# Altium PCB 分电板V2.PcbDoc (part 1 of 2)
Units mil, origin at the board's own origin, x right, y up, seen from the top; angles counter-clockwise.
Board outline 3149.61 x 2362.21 mil, 4 copper layers (Top Layer, GND, POWER, Bottom Layer), stack 23.756 mil thick; 196 components, 158 nets, 590 pads, 320 vias.
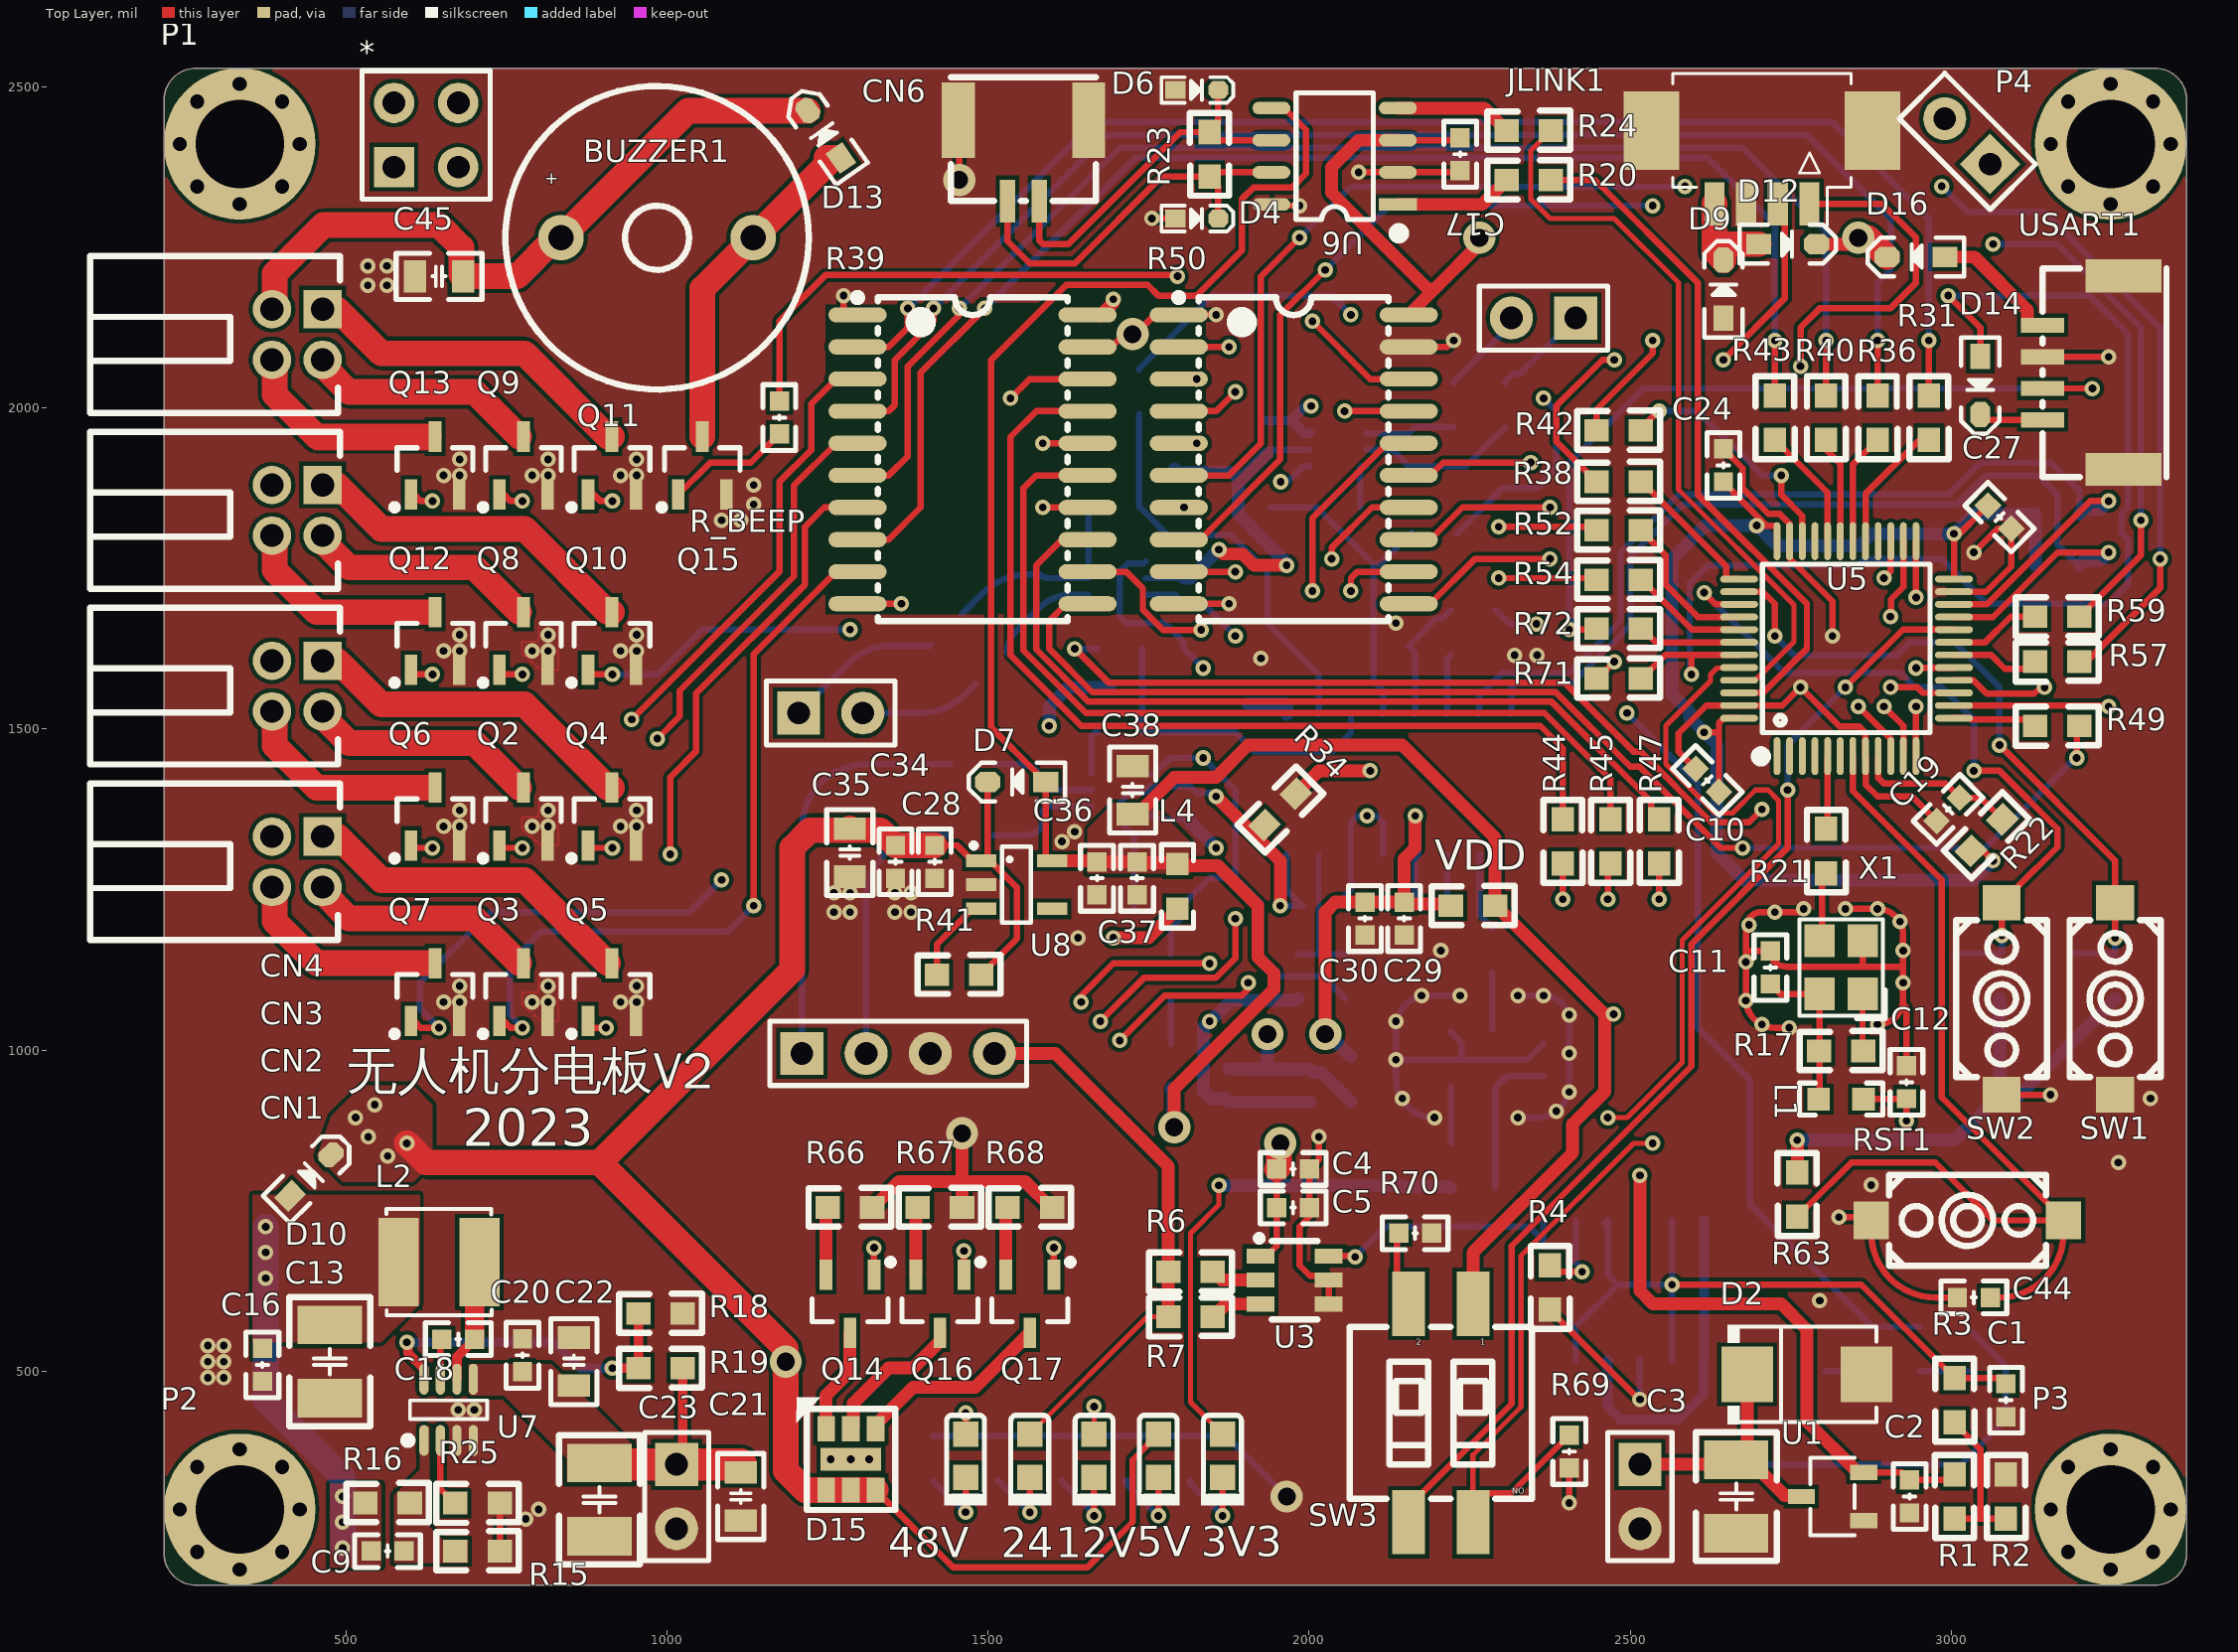
[diagram p0: Top Layer view]
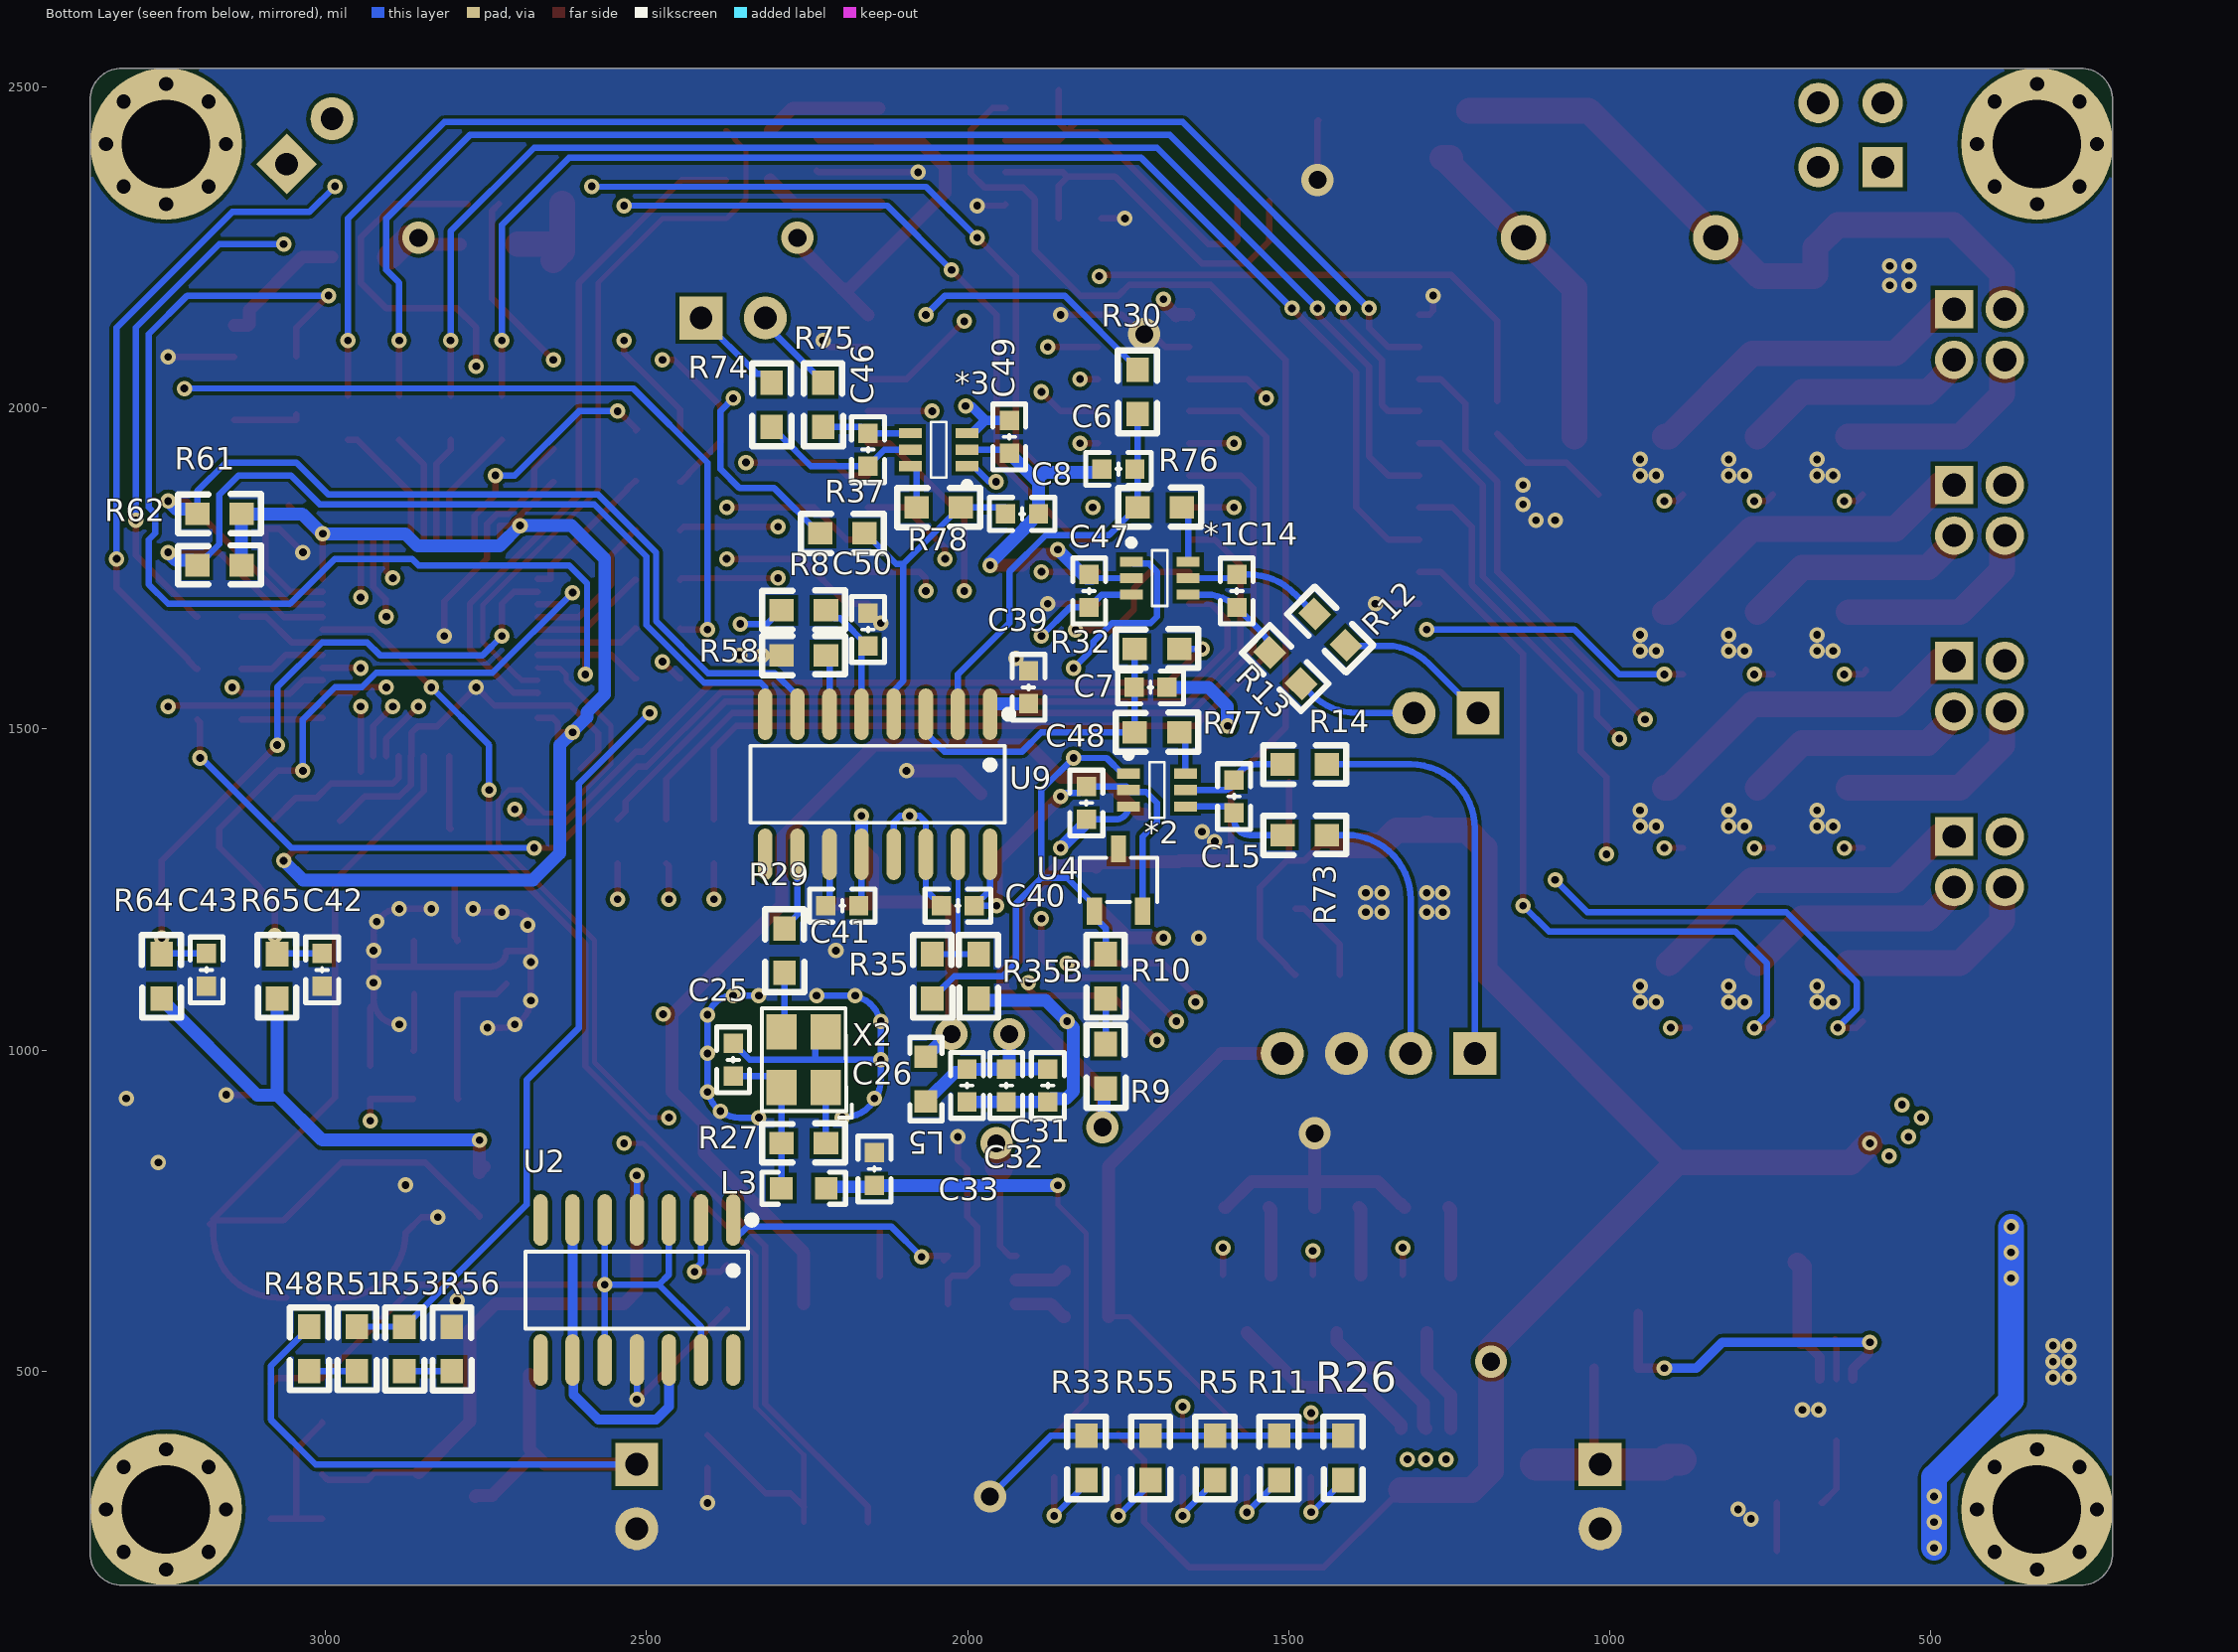
[diagram p1: Bottom Layer view, seen from below]
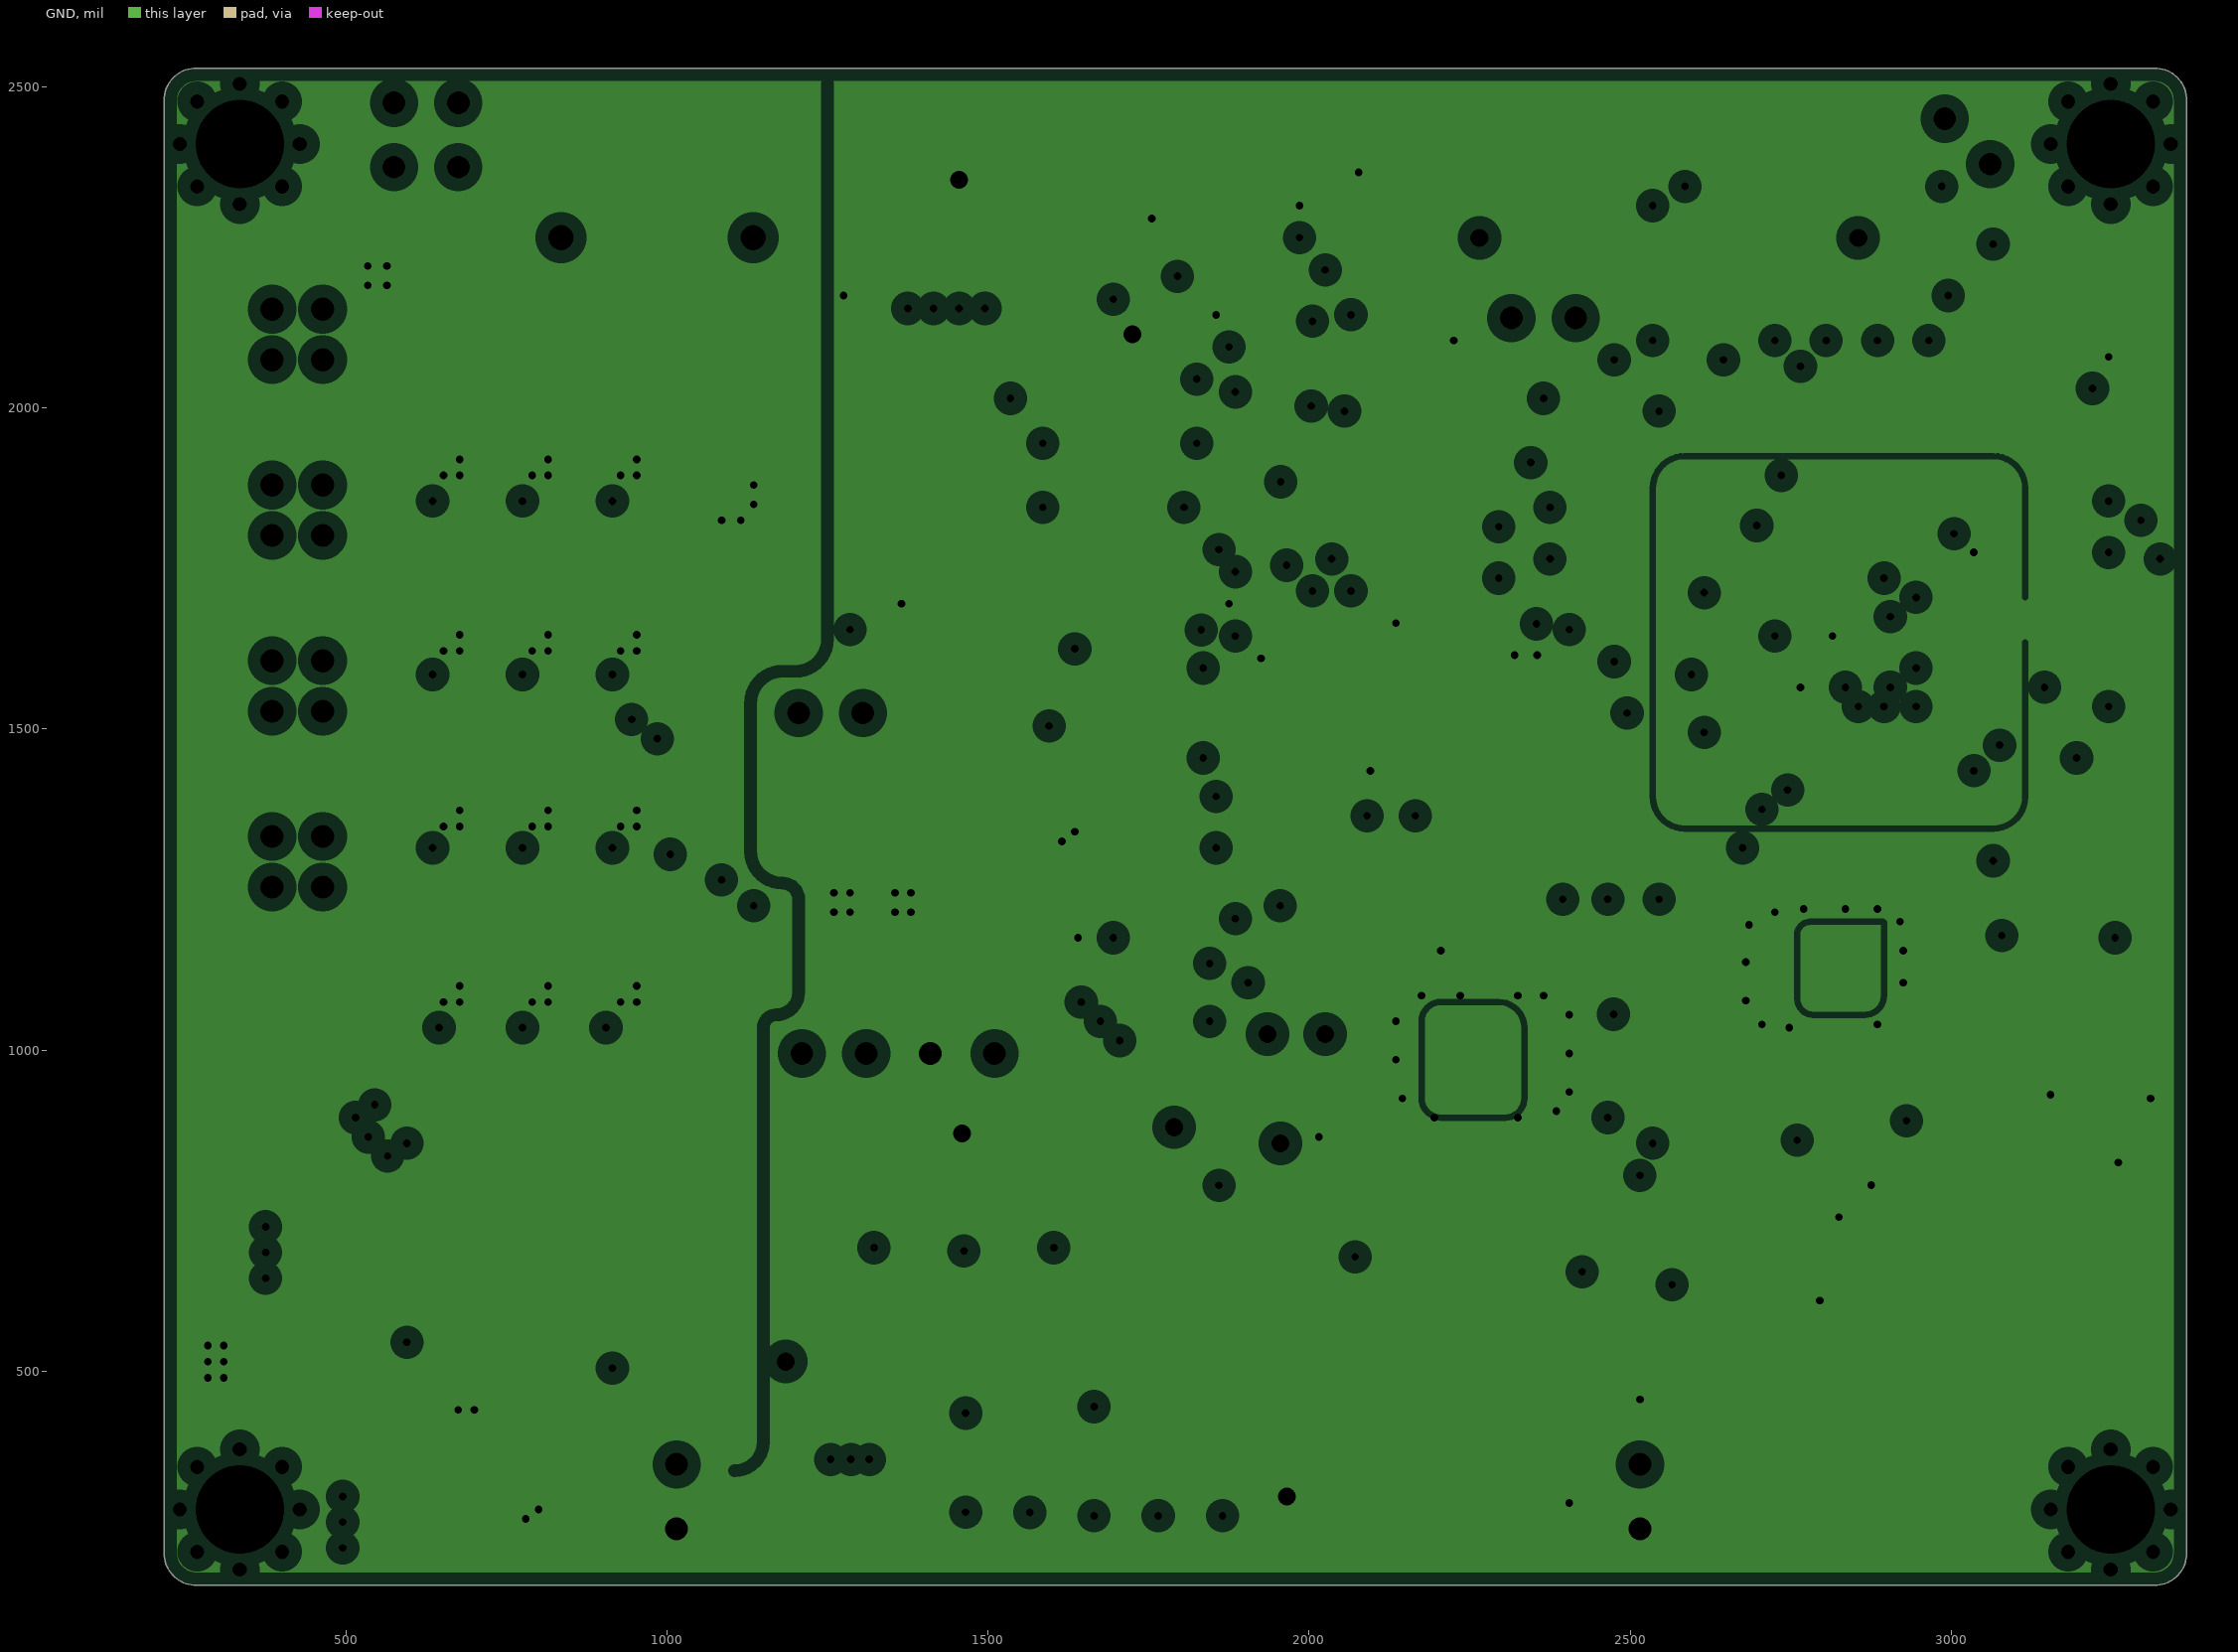
[diagram p2: GND, clearances drawn from the general rule]
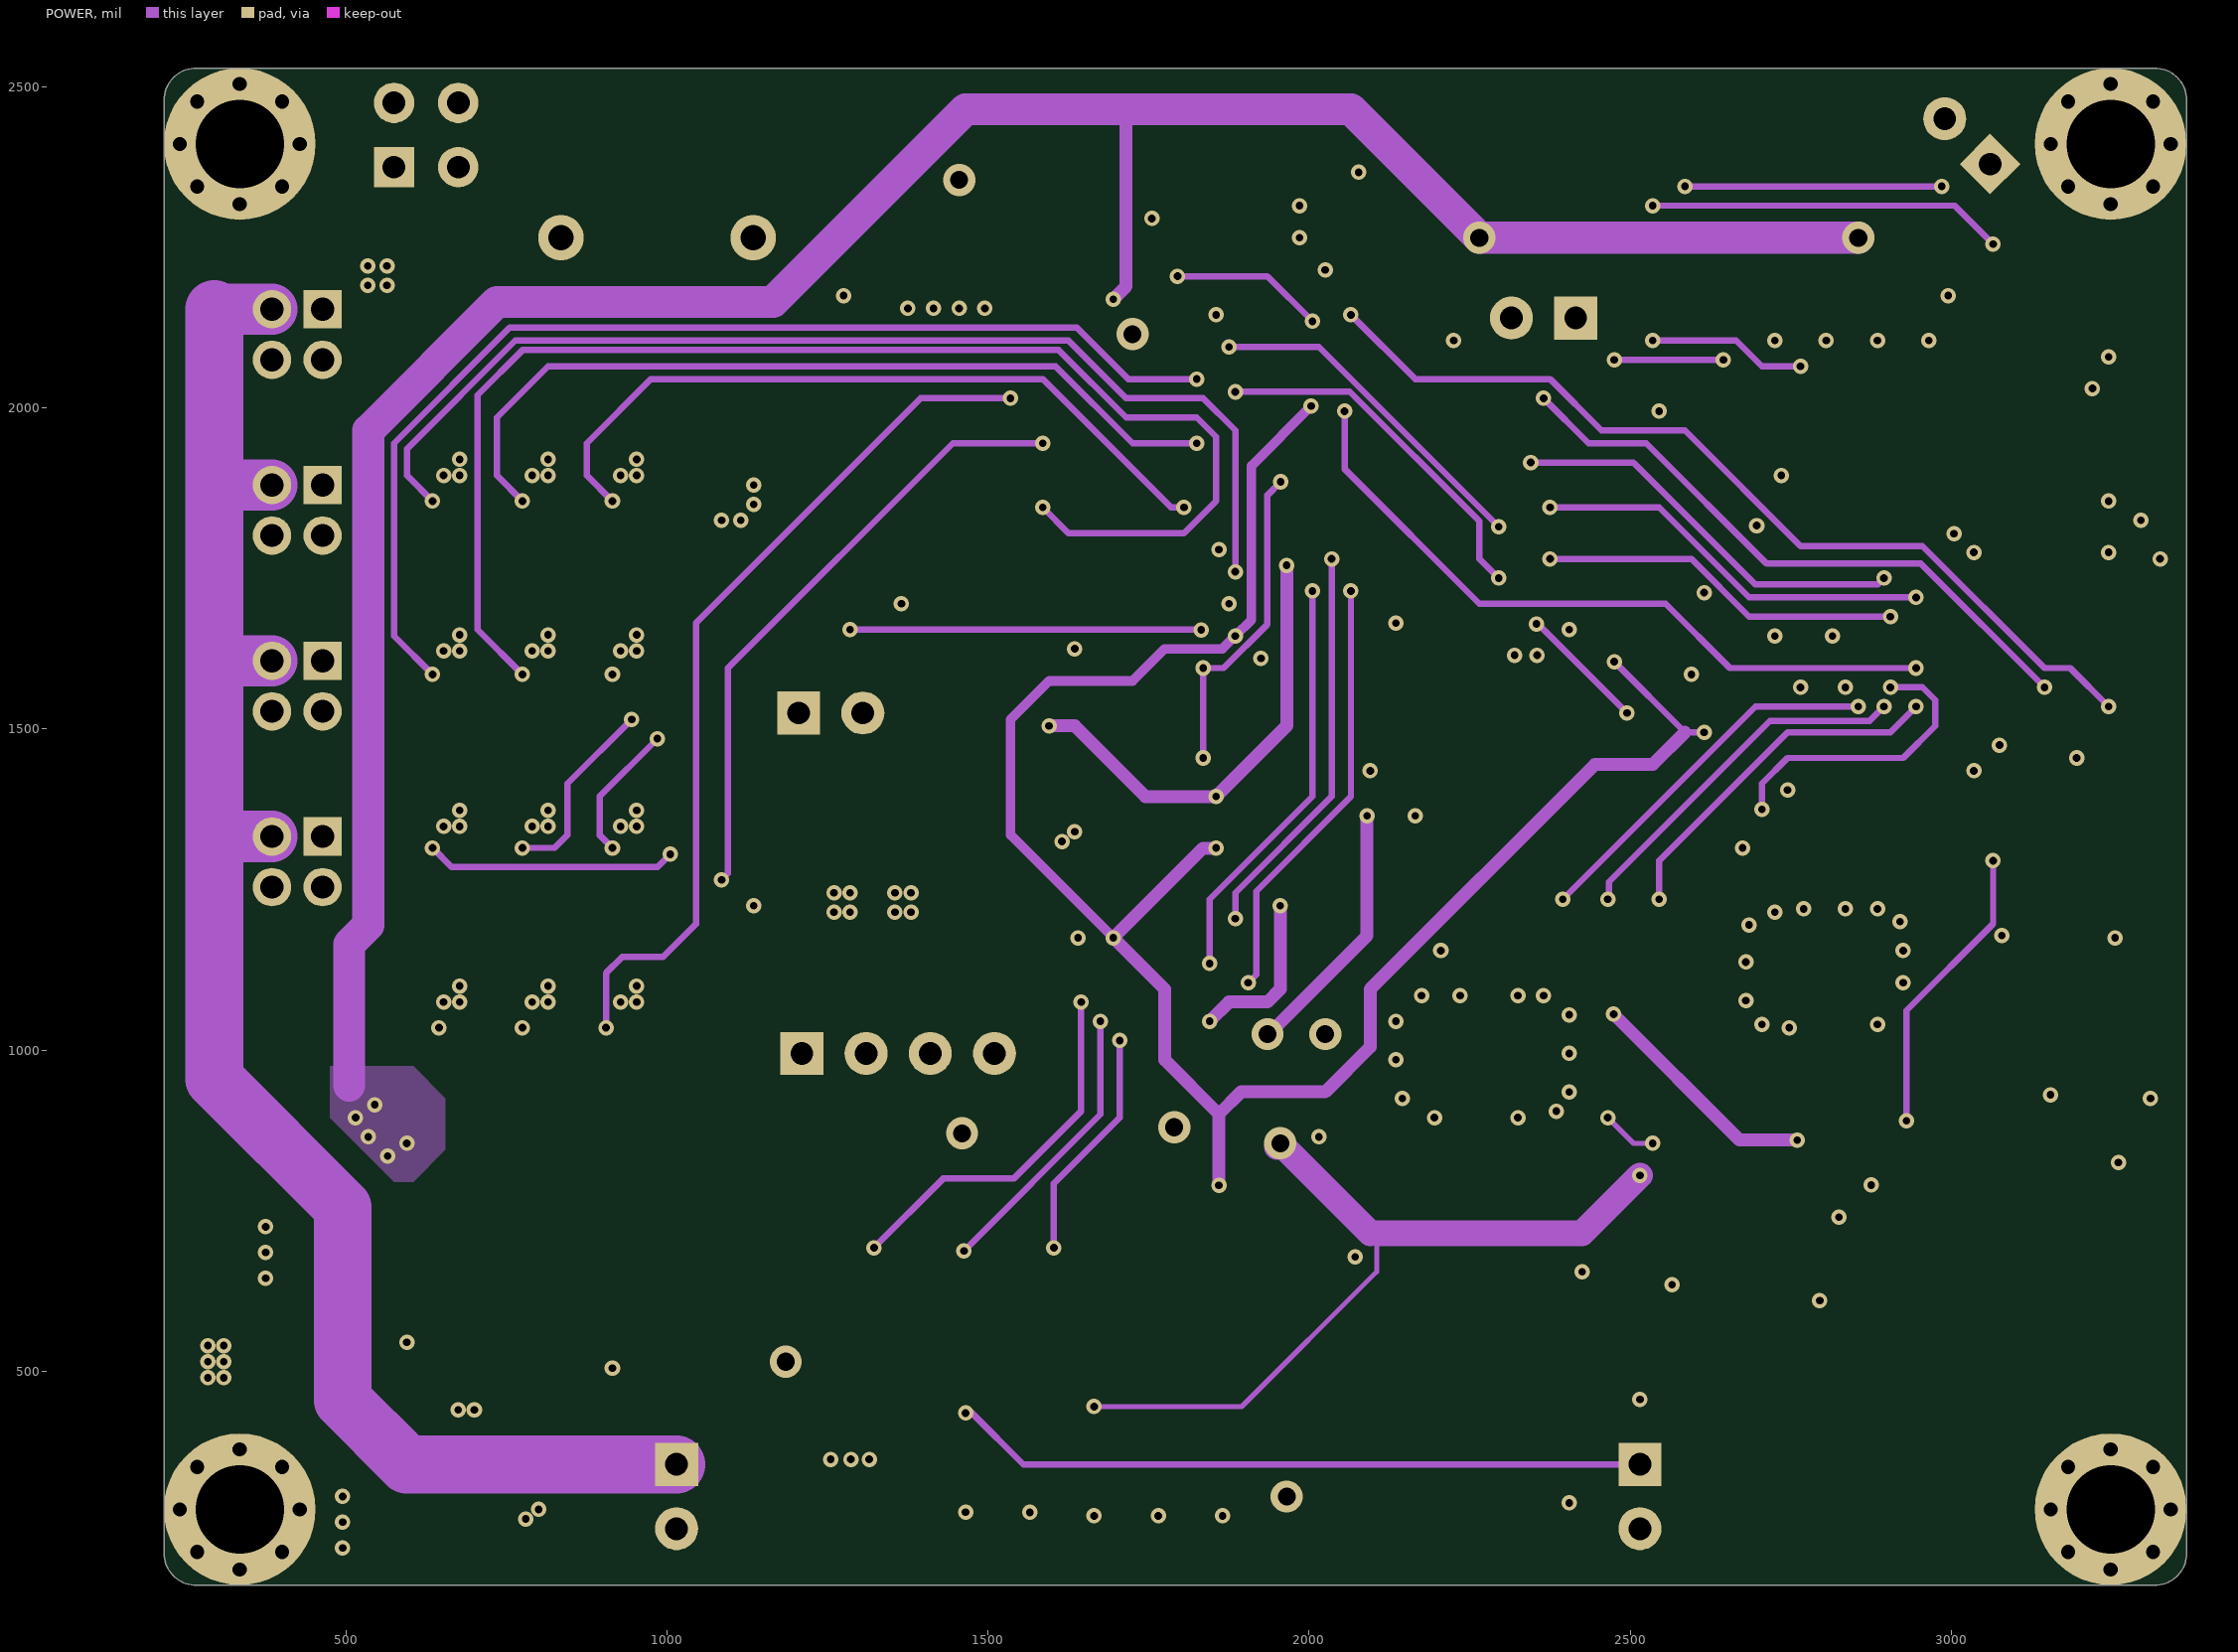
[diagram p3: POWER]

## Layer stack, top to bottom
Top Solder: solder mask 0.4, Solder Resist, Dk 3.5
Top Layer: signal copper 1.4
Dielectric 2: prepreg 2.8, PP-006, Dk 4.1
GND: plane copper 1.3778, net GND
Dielectric 1: dielectric 12.6, FR-4, Dk 4.8
POWER: signal copper 1.3778
Dielectric 3: prepreg 2.8, PP-006, Dk 4.1
Bottom Layer: signal copper 1.4
Bottom Solder: solder mask 0.4, Solder Resist, Dk 3.5

## Board outline
216.89,216.89 216.89,2479.09 cw(c266.89,2479.09) 266.89,2529.09 3316.5,2529.09 cw(c3316.5,2479.09) 3366.5,2479.09 3366.5,216.89 cw(c3316.5,216.89) 3316.5,166.89 266.89,166.89 cw(c266.89,216.89)

## Design rules (kind name [scope] priority, off if disabled: settings)
Clearance [All] p1: gap=5.5 ignorepadtopadclearanceinfootprint=TRUE except(5: Arc-Arc Arc-Track Track-Track; 6: SMDPad-SMDPad SMDPad-THPad SMDPad-Via SMDPad-Fill SMDPad-Poly SMDPad-Region SMDPad-Text SMDPad-Hole THPad-THPad THPad-Via THPad-Fill THPad-Poly THPad-Region THPad-Text THPad-Hole Via-Via Via-Fill Via-Poly Via-Region Via-Text Via-Hole Fill-Hole Poly-Hole Region-Hole Text-Hole)
ComponentClearance [All] p1: gap=1 collisioncheckmode=3 verticalgap=1 showdistances=TRUE
DiffPairsRouting [All] p1: maxlimit=12 minlimit=8 mostfreqgap=10 toplayer_minwidth=8 toplayer_maxwidth=15 toplayer_prefwidth=10 midlayer1_minwidth=8 midlayer1_maxwidth=15 midlayer1_prefwidth=10 bottomlayer_minwidth=8 bottomlayer_maxwidth=15 bottomlayer_prefwidth=10 maxuncoupledlength=500
HoleSize [All] p1: absolutevalues=TRUE maxlimit=1574.8 minlimit=11.81 maxpercent=80.000 minpercent=20.000
HoleToHoleClearance [All] p1: gap=8 allowstackedmicrovias=TRUE
MinimumSolderMaskSliver [All] p1: minsoldermaskwidth=0
NetAntennae [All] p1: netantennaetolerance=1
PasteMaskExpansion [All] p1: expansion=5
PlaneClearance [All] p1: clearance=20
PlaneConnect [All] p1: pad.planeconnectstyle=Relief pad.reliefexpansion=20 pad.reliefentries=4 pad.reliefconductorwidth=25 pad.reliefairgap=10 via.planeconnectstyle=Direct via.reliefexpansion=20 via.reliefentries=4 via.reliefconductorwidth=10 via.reliefairgap=10
PolygonConnect [All] p1: connectstyle=Direct reliefconductorwidth=25 reliefentries=4 polygonreliefangle="90 Angle" airgapwidth=10
RoutingVias [All] p1: holewidth=20 width=35 viastyle="Through Hole" minholewidth=11.81 minwidth=23.62 maxholewidth=1574.8 maxwidth=1580.8
SilkToSilkClearance [All] p1: silktosilkclearance=0
SilkToSolderMaskClearance [IsPad] p1: minsilkscreentomaskgap=0 clearancetoexposedcopper=TRUE
SolderMaskExpansion [All] p1: expansion=5
Width [All] p1: maxlimit=125 minlimit=5 preferedwidth=20
19 further rules are at their usual default settings.

## Components (designator, comment, footprint, x,y, rotation, side; value= is the part's Value field where it differs from the comment)
3V3 "LED/绿" LED_0603 1865,368.47 r90 top
5V "LED/蓝" LED_0603 1765,368.47 r90 top
12V "LED" LED_0603 1665,368.46 r90 top
24 "LED" LED_0603 1565,368.47 r90 top (schematic designator 24_ON)
48V "LED/蓝" LED_0603 1465,368.46 r90 top
* "上中板连接器" 上中板连接器 1015,255 r0 top locked
*1 "LT199" SC70-6L 1700.71,1735 r180 bottom
*2 "LT199" SC70-6L 1705,1405 r180 bottom
*3 "LT199" SC70-6L 2045,1935 r0 bottom
BUZZER1 "TMB12A12" BUZ-TH_BD12.0-P7.60-D0.6-FD 984.6,2265 r0 top value=2400Hz
C1 "10nF" "C 0603_L" 3085,455 r90 top
C2 "10uF" "C 0603_L" 2935,305 r90 top
C3 "CAP" "C 1210_L" 2665,305 r270 top
C4 "1uF" "C 0603_L" 1975,815 r180 top
C5 "100nF" "C 0603_L" 1975,755 r180 top
C6 "1uf" "C 0603_L" 1765,1905 r0 bottom
C7 "1uf" "C 0603_L" 1715,1565 r180 bottom
C8 "1uf" "C 0603_L" 1915,1835 r180 bottom
C9 "22pF/50V/0603" "C 0603_L" 565,220 r0 top
C10 "100nf" "C 0603_L" 2620,1420 r135 top
C11 "100nF" "C 0603_L" 2718.17,1128.75 r270 top
C12 "1uF" "C 0603_L" 2930,950 r270 top
C13 "47uF/50V/1210" "C 1210_L" 475,515 r270 top
C14 "100nf" "C 0603_L" 1580.71,1715 r90 bottom
C15 "100nf" "C 0603_L" 1585,1395 r90 bottom
C16 "100nF/50V/0603" "C 0603_L" 370,510 r270 top
C17 "100nF/50V/0603" "C 0603_L" 2235,2395 r90 top
C18 "10nF/50V/0603" "C 0603_L" 675,550 r180 top
C19 "100nf" "C 0603_L" 2995,1375 r225 top
C20 "100nF/50V/0603" "C 0603_L" 775,525 r90 top
C21 "1uF/50V/0805" "C 0805_L" 1115,305 r270 top
C22 "4.7uF/50V/0805" "C 0805_L" 855,515 r90 top
C23 "47uF/50V/1210" "C 1210_L" 895,300 r270 top
C24 "100nf" "C 0603_L" 2645,1910.59 r270 top
C25 "100nF" "C 0603_L" 2365,985 r270 bottom
C26 "1uF" "C 0603_L" 2145,815 r270 bottom
C27 "100nf" "C 0603_L" 3075,1830 r135 top
C28 "100nF/50V/0603" "C 0603_L" 1417.01,1293.31 r270 top
C29 "100nF/50V/0603" "C 0603_L" 2147.95,1205 r270 top
C30 "100nF/50V/0603" "C 0603_L" 2086.77,1205 r270 top
C31 "1uF/50V/0603" "C 0603_L" 1875,945 r270 bottom
C32 "100nF/50V/0603" "C 0603_L" 1939.69,945 r270 bottom
C33 "10nF/50V/0603" "C 0603_L" 2000.87,945 r270 bottom
C34 "2.2uF/25V/0603" "C 0603_L" 1355.83,1293.31 r270 top
C35 "4.7uF/25V/0805" "C 0805_L" 1284.6,1307.65 r270 top
C36 "100nF/12V/0402" "C 0603_L" 1669.6,1267.65 r270 top
C37 "2.2uF/25V/0603" "C 0603_L" 1731.89,1267.65 r270 top
C38 "4.7uF/25V/0805" "C 0805_L" 1725,1405 r90 top
C39 "1uF" "C 0603_L" 1905,1565 r270 bottom
C40 "0.1uF" "C 0603_L" 2015,1225 r0 bottom
C41 "0.1uF" "C 0603_L" 2195,1225 r0 bottom
C42 "100nF" "C 0603_L" 3005,1125 r270 bottom
C43 "100nF" "C 0603_L" 3185,1125 r270 bottom
C44 "100nF" "C 0603_L" 3035,615 r180 top
C45 "10uf" "C 0805_L" 645,2205 r180 top
C46 "100nf" "C 0603_L" 2155,1935 r270 bottom
C47 "100nF" "C 0603_L" 1810.71,1715 r270 bottom
C48 "100nF" "C 0603_L" 1815,1385 r270 bottom
C49 "100nF" "C 0603_L" 1935,1955 r90 bottom
C50 "1uf" "C 0603_L" 2155,1655 r90 bottom
CN1 "A2006WR-2x2P" CONN-TH_A2006WR-2X2P 424.37,1293.31 r270 top
CN2 "A2006WR-2x2P" CONN-TH_A2006WR-2X2P 424.37,1566.99 r270 top
CN3 "A2006WR-2x2P" CONN-TH_A2006WR-2X2P 424.37,1840.68 r270 top
CN4 "A2006WR-2x2P" CONN-TH_A2006WR-2X2P 424.37,2114.37 r270 top
CN6 "GH1.25-2P" GH1.25-2P-LT 1555,2385 r180 top
D2 "SMBJ70A_C114008" SMB_L4.6-W3.6-LS5.3-RD 2775,495 r0 top
D4 "ESD5Z5VL" SOD-523 1825,2295 r0 top
D6 "ESD5Z5VL" SOD-523 1825,2495 r0 top
D7 "SD103AWS" SOD-323 1544.6,1417.65 r180 top
D9 "BZX52B5V6" SOD-323 2645,2185 r90 top
D10 "SD103AWS" SOD-323 445,805 r45 top
D12 "SD103AWS" SOD-323 2745,2255 r0 top
D13 "SD103AWS" SOD-323 1245,2426 r125 top
D14 "SD103AWS" SOD-323 3045,2035 r270 top
D15 "RGB3030" LED-SMD_L3.0-W3.0_C9900015600 1272.28,330.25 r180 top
D16 "SD103AWS" SOD-323 2945,2235 r180 top
JLINK1 "MX1.25_4p" MX1.25_4PIN 2705,2375 r0 top
L1 "磁珠470Ω/100MHz" "L 0603" 2828.17,923.75 r0 top
L2 "33uF/0.9A" IND-SMD_L4.0-W4.0 645,670 r180 top
L3 "磁珠470Ω/100MHz" "L 0603" 2255,785 r180 bottom
L4 "磁珠470Ω/100MHz" "L 0603" 1795,1255 r90 top
L5 "磁珠470Ω/100MHz" "L 0603" 2065,955 r270 bottom
P1 "固定孔" 固定孔 334.69,2410.99 r0 top
P2 "固定孔" 固定孔 334.69,285.01 r0 top
P3 "固定孔" 固定孔 3248.08,285.01 r0 top
P4 "固定孔" 固定孔 3248.08,2410.99 r0 top
Q2 "5N10-MS" SOT23-3N 776.61,1363.71 r0 top
Q3 "5N10-MS" SOT23-3N 776.61,1090.38 r0 top
Q4 "5N10-MS" SOT23-3N 914.38,1363.71 r0 top
Q5 "5N10-MS" SOT23-3N 914.38,1090.38 r0 top
Q6 "5N10-MS" SOT23-3N 638.83,1363.71 r0 top
Q7 "5N10-MS" SOT23-3N 638.83,1090.38 r0 top
Q8 "5N10-MS" SOT23-3N 776.61,1637.04 r0 top
Q9 "5N10-MS" SOT23-3N 776.61,1910.38 r0 top
Q10 "5N10-MS" SOT23-3N 914.38,1637.04 r0 top
Q11 "5N10-MS" SOT23-3N 914.38,1910.38 r0 top
Q12 "5N10-MS" SOT23-3N 638.83,1637.04 r0 top
Q13 "5N10-MS" SOT23-3N 638.83,1910.38 r0 top
Q14 "5N10-MS" SOT23-3N 1285,605 r180 top
Q15 "5N10-MS" SOT23-3N 1055,1910.38 r0 top
Q16 "5N10-MS" SOT23-3N 1425,605 r180 top
Q17 "5N10-MS" SOT23-3N 1565,605 r180 top
R1 "100K" "R 0603_L" 3005,305 r270 top
R2 "10K" "R 0603_L" 3085,305 r90 top
R3 "10K" "R 0603_L" 3005,455 r90 top
R4 "10K" "R 0603_L" 2375,630.5 r90 top
R5 "47K" "R 0603_L" 1614.5,365 r270 bottom
R6 "10" "R 0603_L" 1815,655 r0 top
R7 "10" "R 0603_L" 1815,585 r0 top
R8 "330" "R 0603_L" 2255,1685 r0 bottom
R9 "1k" "R 0603_L" 1785,975 r90 bottom
R10 "1k" "R 0603_L" 1785,1115 r90 bottom
R11 "47K" "R 0603_L" 1514.75,365 r270 bottom
R12 "100" "R 0603_L" 1435,1655 r225 bottom
R13 "100" "R 0603_L" 1505,1595 r225 bottom
R14 "100" "R 0603_L" 1475,1445 r180 bottom
R15 "30k/0603" "R 0603_L" 705,220 r180 top
R16 "220k/0603" "R 0603_L" 565,295 r180 top
R17 "10k/0603" "R 0603_L" 2828.17,998.75 r180 top
R18 "30k/0603" "R 0603_L" 990,590 r180 top
R19 "100k/0603" "R 0603_L" 990,505 r0 top
R20 "330R/0603" "R 0603_L" 2342,2355 r180 top
R21 "10R" "R 0603_L" 2805,1310 r90 top
R22 "0R" "R 0603_L" 3055,1335 r45 top
R23 "120R/0603" "R 0603_L" 1845,2395 r270 top
R24 "330R/0603" "R 0603_L" 2342,2431.88 r180 top
R25 "47k/0603" "R 0603_L" 705,295 r0 top
R26 "47K" "R 0603_L" 1415,365 r270 bottom
R27 "10k/0603" "R 0603_L" 2255,855 r0 bottom
R29 "10R" "R 0603_L" 2285,1155 r90 bottom
R30 "NAN" "R 0603_L" 1735,2025 r270 bottom
R31 "100R" "R 0603_L" 2965,1985 r90 top
R32 "NAN" "R 0603_L" 1705,1625 r0 bottom
R33 "2k/0603" "R 0603_L" 1815,365 r90 bottom
R34 "0" "R 0603_L" 1955,1375 r45 top
R35 "0" "R 0603_L" 2055,1115 r90 bottom
R35B "NAN" "R 0603_L" 1982.75,1115 r270 bottom
R36 "100R" "R 0603_L" 2885,1985 r90 top
R37 "NAN" "R 0603_L" 2195,1805 r180 bottom
R38 "100R/0603" "R 0603_L" 2482,1885 r180 top
R39 "AIP74HC244SA.TB" SOP-20_L12.7-W7.5-P1.27-LS10.2-BL 1475.87,1920.43 r270 top
R40 "100R" "R 0603_L" 2805,1985 r90 top
R41 "4.7k/0603" "R 0603_L" 1454.6,1117.65 r180 top
R42 "100R/0603" "R 0603_L" 2482,1965 r180 top
R43 "100R" "R 0603_L" 2725,1985 r90 top
R44 "100R" "R 0603_L" 2395,1325 r90 top
R45 "100R" "R 0603_L" 2469.07,1325 r90 top
R47 "100R" "R 0603_L" 2545,1325 r90 top
R48 "0" "R 0603_L" 3025,535 r90 bottom
R49 "100R" "R 0603_L" 3165,1505 r0 top
R50 "AIP74HC244SA.TB" SOP-20_L12.7-W7.5-P1.27-LS10.2-BL 1975.87,1920.43 r270 top
R51 "75K" "R 0603_L" 2951,535 r90 bottom
R52 "100R" "R 0603_L" 2482,1809.42 r180 top
R53 "4.7K" "R 0603_L" 2877,534.5 r90 bottom
R54 "100R" "R 0603_L" 2482,1732.54 r180 top
R55 "4.7k/0603" "R 0603_L" 1715.25,365 r90 bottom
R56 "0" "R 0603_L" 2803,534.5 r90 bottom
R57 "100R" "R 0603_L" 3165,1605 r0 top
R58 "330R" "R 0603_L" 2255,1615 r180 bottom
R59 "100R" "R 0603_L" 3165,1675 r0 top
R61 "330R" "R 0603_L" 3165,1835 r0 bottom
R62 "330R" "R 0603_L" 3165,1755 r0 bottom
R63 "4.7k/0603" "R 0603_L" 2760,775 r270 top
R64 "10k" "R 0603_L" 3255,1115 r270 bottom
R65 "10k" "R 0603_L" 3075,1115 r270 bottom
R66 "3.3K" "R 0603_L" 1285,755 r180 top
R67 "3.3K" "R 0603_L" 1425,755 r180 top
R68 "3.3K" "R 0603_L" 1565,755 r180 top
R69 "10K" "C 0603_L" 2405,375 r90 top
R70 "10K" "C 0603_L" 2165,715 r0 top
R71 "47k/0603" "R 0603_L" 2482,1578.77 r180 top
R72 "100/0603" "R 0603_L" 2482,1656.65 r0 top
R73 "100" "R 0603_L" 1475,1335 r180 bottom
R74 "100" "R 0603_L" 2305,2005 r90 bottom
R75 "100" "R 0603_L" 2225,2005 r90 bottom
R76 "330" "R 0603_L" 1700.71,1845 r0 bottom
R77 "330" "R 0603_L" 1705,1495 r0 bottom
R78 "330" "R 0603_L" 2045,1845 r180 bottom
R_BEEP "10" "C 0603_L" 1175,1985 r270 top
RST1 "K2-1107ST-A4DW-06_C118141" "KEY-SMD_L6.2-W3.6-LS8.0 - duplicate" 3025,735 r180 top
SW1 "K2-1107ST-A4DW-06_C118141" "KEY-SMD_L6.2-W3.6-LS8.0 - duplicate" 3255,1080.16 r270 top
SW2 "K2-1107ST-A4DW-06_C118141" "KEY-SMD_L6.2-W3.6-LS8.0 - duplicate" 3078.37,1080.16 r270 top
SW3 "DS-02BP" SW-SMD_EM-02KP 2205,435 r180 top
U1 "ZXTR2112F-7" SOT-23-3_L2.9-W1.6-P1.90-LS2.8-BR 2815,305 r0 top
U2 "LM324DR" "SOIC-14_L8.7-W3.9-P1.27-LS6.0-BL - duplicate" 2515,626.54 r0 bottom
U3 "SL27511" SOT-23-6_L2.9-W1.6-P0.95-LS2.8-BR 1977.19,642.02 r180 top
U4 "LM4041C12IDBZR" SOT-23-3_L2.9-W1.6-P1.90-LS2.8-BR 1765,1265 r270 bottom
U5 "STM32F103C8T6" LQFP-48_L7.0-W7.0-P0.50-LS9.0-BL 2836.74,1625.23 r0 top
U6 "TJA1051T/3/1J" SOP8_L 2039.56,2391.93 r180 top
U7 "SY8303AIC" TSOT-23-8_L2.9-W1.6-P0.65-LS2.8-BR 660,440 r270 top
U8 "LP5907QMFX-3.3Q1" SOT23-5N 1544.6,1257.65 r270 top
U9 "BH45B1225" NSOP-16_L9.9-W3.9-P1.27-LS6.0-BL 2140,1414.02 r0 bottom
USART1 "GH1.25" "GH1.25 4P-WT" 3205,2055 r90 top
VDD "0" "R 0603_L" 2255,1225 r180 top
X1 "YSO680PR_12M_3.3V" "OSC 3225-4P" 2828.46,1128.75 r90 top
X2 "OT32258MJBA4SL" OSC-SMD_4P-L3.2-W2.5-BL 2255,985 r90 bottom value=8MHz

## Footprints (in the part's own frame and the unit in brackets; to place one, negate y for a bottom-side part, rotate by r counter-clockwise, add the part's x,y. Pads: shape width x height; smd on the part's side, far side on the other; paste and mask are expansions set on the pad)
BUZ-TH_BD12.0-P7.60-D0.6-FD [mm]
  round 1.8 hole 1 paste+0 mask+0.051: 1(-3.8,0) 2(3.8,0)
  silkscreen extent -6,-6 6,6
"C 0603_L" [mil] "无极性贴片电容"
  rect 30x30 smd: 1(-25.59,0) 2(25.59,0)
  silkscreen extent -51,-26 51,26, body extent -31,-16 31,16, height 32
"C 0805_L" [mil] "无极性贴片电容"
  rect 35x50 smd: 1(-37.4,0) 2(37.4,0)
  silkscreen extent -67,-36 67,36, body extent -39,-24 39,24, height 20
"C 1210_L" [mil] "无极性贴片电容"
  rect 60x100 smd: 1(-57.09,0) 2(57.09,0)
  silkscreen extent -100,-63 100,63, body extent -63,-51 63,51, height 60
CONN-TH_A2006WR-2X2P [mil]
  rect 60x60 hole 36 paste+0 mask+2: 1(-39.37,39.37)
  round 60 hole 36 paste+0 mask+2: 2(-39.37,-39.37) 3(39.37,39.37) 4(39.37,-39.37)
  silkscreen extent -122,-323 122,66
"GH1.25 4P-WT" [mil]
  rect 23.6x67 smd: 1(73.8,62.99) 2(24.59,62.99) 3(-24.61,62.99) 4(-73.8,62.99)
  rect 51.18x118.11 smd: 5(150.59,-62.99) 6(-150.6,-62.99)
  silkscreen extent -162,-130 162,63, body extent -162,-110 162,81, height 172
GH1.25-2P-LT [mil]
  rect 23.6x67 smd: 1(24.6,62.99) 2(-24.6,62.99)
  rect 51.18x118.11 smd: 3(101.38,-62.99) 4(-101.38,-62.99)
  silkscreen extent -113,-130 113,63, body extent -110,-121 116,81, height 162
IND-SMD_L4.0-W4.0 [mm]
  rect 1.6x3.5 smd: 1(-1.6,0) 2(1.6,0)
  silkscreen extent -2.08,-2.1 2.08,2.1
"KEY-SMD_L6.2-W3.6-LS8.0 - duplicate" [mm]
  rect 1.4x1.5 smd paste+0 mask+0.051: 1(-3.8,0) 2(3.8,0)
  silkscreen extent -3.1,-1.8 3.1,1.8
"L 0603" [mil] "小功率贴片电感"
  rect 35x35 smd: 1(-35,0) 2(35,0)
  silkscreen extent -65,-25 65,25, body extent -31,-16 31,16, height 31
LED-SMD_L3.0-W3.0_C9900015600 [mm]
  rect 0.7x1 smd paste+0.102 mask+0.05: 1(-1.339,0.387) 2(-1.339,-2.043) 3(-0.359,0.387) 4(-0.359,-2.043) 5(0.621,0.387) 6(0.621,-2.043)
  rect 2.4x0.9 smd paste+0.102 mask+0.05: 7(-0.359,-0.828)
  silkscreen extent -2.11,-3.3 1.8,1.17
LED_0603 [mm]
  rect 1x1 smd paste+0 mask+0: 1(0.85,0) 2(-0.85,0)
  silkscreen extent -1.97,-0.85 1.6,0.85, body extent -0.92,-0.53 1.09,0.53, height 0.46
LQFP-48_L7.0-W7.0-P0.50-LS9.0-BL [mm]
  oval 0.27x1.5 smd paste+0 mask+0.05: 1(-2.75,-4.25) 2(-2.25,-4.25) 3(-1.75,-4.25) 4(-1.25,-4.25) 5(-0.75,-4.25) 6(-0.25,-4.25) 7(0.25,-4.25) 8(0.75,-4.25) 9(1.25,-4.25) 10(1.75,-4.25) 11(2.25,-4.25) 12(2.75,-4.25) 25(2.75,4.25) 26(2.25,4.25) 27(1.75,4.25) 28(1.25,4.25) 29(0.75,4.25) 30(0.25,4.25) 31(-0.25,4.25) 32(-0.75,4.25) 33(-1.25,4.25) 34(-1.75,4.25) 35(-2.25,4.25) 36(-2.75,4.25)
  oval 1.5x0.27 smd paste+0 mask+0.05: 13(4.25,-2.75) 14(4.25,-2.25) 15(4.25,-1.75) 16(4.25,-1.25) 17(4.25,-0.75) 18(4.25,-0.25) 19(4.25,0.25) 20(4.25,0.75) 21(4.25,1.25) 22(4.25,1.75) 23(4.25,2.25) 24(4.25,2.75) 37(-4.25,2.75) 38(-4.25,2.25) 39(-4.25,1.75) 40(-4.25,1.25) 41(-4.25,0.75) 42(-4.25,0.25) 43(-4.25,-0.25) 44(-4.25,-0.75) 45(-4.25,-1.25) 46(-4.25,-1.75) 47(-4.25,-2.25) 48(-4.25,-2.75)
  silkscreen extent -3.59,-4.46 3.3,3.34
MX1.25_4PIN [mm]
  rect 0.8x1.7 smd: 1(1.875,-1.45) 2(0.625,-1.45) 3(-0.625,-1.45) 4(-1.875,-1.45)
  rect 2.2x3.1 smd: 5(-4.375,1.45) 6(4.375,1.45)
  silkscreen extent -3.52,-2.3 3.53,3.7, body extent -5.21,-1.65 5.01,2.25, height 4.75
NSOP-16_L9.9-W3.9-P1.27-LS6.0-BL [mil]
  oval 22.6x80.24 smd paste+0 mask+2: 1(-175,-109.02) 2(-125,-109.02) 3(-75,-109.02) 4(-25,-109.02) 5(25,-109.02) 6(75,-109.02) 7(125,-109.02) 8(175,-109.02) 9(175,109.02) 10(125,109.02) 11(75,109.02) 12(25,109.02) 13(-25,109.02) 14(-75,109.02) 15(-125,109.02) 16(-175,109.02)
  silkscreen extent -210,-115 198,60
"OSC 3225-4P" [mm] "3.2*2.5*0.7mm(长宽高)"
  rect 1.3x1.2 smd: 1(-1.05,-0.85) 2(1.05,-0.85) 3(1.05,0.85) 4(-1.05,0.85)
  silkscreen extent -2.03,-1.75 1.91,1.65, body extent -1.6,-1.25 1.6,1.25, height 0.7
OSC-SMD_4P-L3.2-W2.5-BL [mm]
  rect 1.4x1.2 smd paste+0 mask+0.051: 1(-1.1,-0.875) 2(1.1,-0.875) 3(1.1,0.875) 4(-1.1,0.875)
  silkscreen extent -2.29,-1.9 2.03,1.65
"R 0603_L" [mil] "1/10W"
  rect 38x35 smd: 1(-34.5,0) 2(34.5,0)
  silkscreen extent -64,-31 65,30, body extent -34,-16 29,16, height 18
SC70-6L [mm] "6-Leads, Body 2.03x2.10mm, Pitch 0.65mm, IPC Medium Density"
  rect 0.9x0.4 smd: 1(-1.125,0.65) 2(-1.125,0) 3(-1.125,-0.65) 4(1.125,-0.65) 5(1.125,0) 6(1.125,0.65)
  silkscreen extent -1.25,-1.1 0.3,1.52, body extent -0.67,-1.1 0.67,1.1, height 1.1
SMB_L4.6-W3.6-LS5.3-RD [mil]
  rect 80.61x86.31 smd paste+0 mask+2: 1(-92.94,0) 2(92.94,0)
  silkscreen extent -123,-77 108,77
SOD-323 [mm] "1.8x1.3X0.9mm（长宽高，不包括引脚）"
  rect 1x0.8 smd: 1(-1.143,0)
  oct 1x0.8 smd: 2(1.143,0)
  silkscreen extent -1.91,-0.76 1.91,0.76, body extent -1.34,-0.63 1.31,0.67, height 1
SOD-523 [mm] "1.2x0.8X0.6mm（长宽高，不包括引脚）"
  rect 0.8x0.7 smd: 1(-0.85,0)
  oct 0.8x0.7 smd: 2(0.85,0)
  silkscreen extent -1.4,-0.51 1.45,0.51, body extent -0.8,-0.4 0.8,0.4, height 0.65
"SOIC-14_L8.7-W3.9-P1.27-LS6.0-BL - duplicate" [mil]
  oval 22.6x80.24 smd paste+0 mask+2: 1(-150,-109.02) 2(-100,-109.02) 3(-50,-109.02) 4(0,-109.02) 5(50,-109.02) 6(100,-109.02) 7(150,-109.02) 8(150,109.02) 9(100,109.02) 10(50,109.02) 11(0,109.02) 12(-50,109.02) 13(-100,109.02) 14(-150,109.02)
  silkscreen extent -185,-115 173,60
SOP8_L [mm] "5*6*1.8mm（长宽高）"
  rect 1.5x0.5 smd: 1(-2.5,1.905)
  oval 1.5x0.5 smd: 2(-2.5,0.635) 3(-2.5,-0.635) 4(-2.5,-1.905) 5(2.5,-1.905) 6(2.5,-0.635) 7(2.5,0.635) 8(2.5,1.905)
  silkscreen extent -2.69,-2.5 1.52,3.2, body extent -3,-2.5 3,2.5, height 1.9
SOP-20_L12.7-W7.5-P1.27-LS10.2-BL [mm]
  oval 0.6x2.3 smd: 1(-5.704,-4.55) 2(-4.434,-4.55) 3(-3.164,-4.55) 4(-1.894,-4.55) 5(-0.624,-4.55) 6(0.646,-4.55) 7(1.916,-4.55) 8(3.186,-4.55) 9(4.456,-4.55) 10(5.726,-4.55) 11(5.726,4.55) 12(4.456,4.55) 13(3.186,4.55) 14(1.916,4.55) 15(0.646,4.55) 16(-0.624,4.55) 17(-1.894,4.55) 18(-3.164,4.55) 19(-4.434,4.55) 20(-5.704,4.55)
  silkscreen extent -6.54,-4.7 6.41,3.75
SOT23-3N [mm] "3x1.3x1mm(长宽高)"
  rect 0.5x1.2 smd: 1(-0.95,-1.143) 2(0.95,-1.143) 3(0,1.143)
  silkscreen extent -1.72,-1.78 1.5,0.7, body extent -1.5,-1.2 1.5,1.2, height 1.05
SOT23-5N [mm] "3x1.6x1.1mm(长宽高)"
  rect 0.5x1.2 smd: 1(-0.95,-1.4) 2(0,-1.4) 3(0.95,-1.4) 4(0.95,1.4) 5(-0.95,1.4)
  silkscreen extent -1.63,-1.78 1.5,0.56, body extent -1.5,-1.4 1.5,1.4, height 1.15
SOT-23-3_L2.9-W1.6-P1.90-LS2.8-BR [mm]
  rect 1.07x0.6 smd: 1(1.235,-0.95) 2(1.235,0.95) 3(-1.235,0)
  silkscreen extent -0.88,-1.54 0.88,1.54, body extent -1.2,-1.5 1.2,1.5, height 1.05
SOT-23-6_L2.9-W1.6-P0.95-LS2.8-BR [mm]
  rect 1.1x0.6 smd paste+0 mask+0.051: 1(1.35,-0.95) 2(1.35,0) 3(1.35,0.95) 4(-1.35,0.95) 5(-1.35,0) 6(-1.35,-0.95)
  silkscreen extent -0.9,-1.78 1.52,1.55
SW-SMD_EM-02KP [mil]
  rect 51.18x100 smd paste+0 mask+2: 1(-50,-170) 2(50,-170) 3(50,170) 4(-50,170)
  silkscreen extent -142,-134 142,134
TSOT-23-8_L2.9-W1.6-P0.65-LS2.8-BR [mil]
  oval 48.1x14.3 smd mask+2: 1(47.7,-38.4) 2(47.7,-12.8) 3(47.7,12.8) 4(47.7,38.4) 5(-47.7,38.4) 6(-47.7,12.8) 7(-47.7,-12.8) 8(-47.7,-38.4)
  silkscreen extent -15,-69 54,60, body extent -55,-57 55,57, height 39
上中板连接器 [mm]
  rect 1.7x1.7 hole 0.9: 1(38.1,2.54) 3(0,2.54) 5(4.826,32.258) 7(4.953,18.796) 9(35.56,47.879)
  round 1.7 hole 0.9: 2(38.1,0) 4(0,0) 6(7.366,32.258) 8(7.493,18.796) 10(12.573,18.796) 11(33.02,47.879) 12(50.156,55.762) 13(10.033,18.796)
  rect 1.6x1.6 hole 0.9: 12(-11.176,53.848)
  round 1.6 hole 0.9: 12(-11.176,56.388) 12(-8.636,53.848) 12(-8.636,56.388)
  rect 1.7x1.7 hole 0.9 rot 135: 12(51.952,53.966)
  silkscreen extent -12.45,-1.27 53.75,57.66, body extent -12.45,-1.27 53.75,57.66, height 8.5
固定孔 [mm]
  round 6 hole 3.5: 1(0,0)

## Part data
3V3 5V 48V: library part LED, "发光二极管"
12V 24: "发光二极管"
*1 *2 *3: "双向、零漂移电流感应放大器"
BUZZER1: Current Consumption=30mA, JLCPCB Part Class="Extended Part", LCSC Part Name=有源, Manufacturer=YUEXIN(悦?, Operating Temperature=-30℃~+85?, Operating Voltage=8V~15V, Rated Voltage=12V, Add into BOM=yes, Convert to PCB=yes, Datasheet=https://atta.szlcsc.com/upload/public/pdf/source/20200927/C781859_CEC7B7F6A9D62F380D126441DF0F265C.pdf, Device=TMB12A12, Diameter (φD)=12mm, Height=9.5mm, Length=-, Manufacturer Part=TMB12A12, Name=2400Hz, Oscillator Circuit=有源(, Sound Pressure Level (SPL)=88dB@10cm, Supplier=LCSC, Supplier Footprint=插件,D=1, Supplier Part=C781861, Symbol=TMB12A12_C781861, Technology Type=电?, Width=-
C1 C2 C4 C5 C6 C7 C8 C9 C10 C13 C14 C15 C16 C17 C18 C19 C20 C21 C22 C23 C24 C27 C29 C30 C31 C32 C33 C35 C36 C38 C45 C46 C47 C48 C49 C50: library part CAP, "陶瓷电容"
C3: "陶瓷电容"
C11 C12 C25 C26 C28 C34 C37 C39 C40 C41 C42 C43 C44: library part CAP, "Capacitor"
CN1 CN2 CN3 CN4: JLCPCB Part Class="Extended Part", LCSC Part Name="PH 2mm 2x2P 镀?", Manufacturer=CJT(长江, Add into BOM=yes, Contact Material=黄?, Convert to PCB=yes, Datasheet=https://atta.szlcsc.com/upload/public/pdf/source/20180913/C273077_48101FEEEEEA06DA8F558152F6E7ED54.pdf, Device=A2006WR-2x2P, Manufacturer Part=A2006WR-2x2P, Mounting Style=-, Name=A2006WR-2x2P, Number of PINs Per Row=2, Number of Rows=2, Pins Structure=2x2P, Pitch=2mm, Reference Series=PH, Row Spacing=2mm, Supplier=LCSC, Supplier Footprint=弯插,P=, Supplier Part=C273077, Symbol=A2006WR-2X2P_C273077
CN6: "连接端子", BOM_Manufacturer="Changjiang Connectors", BOM_Manufacturer Part=A1257WR-S-2P, BOM_Supplier=LCSC, BOM_Supplier Part=C225125, Contributor=LCSC, spicePre=C, spiceSymbolName=A1257WR-S-2P
D2: Breakdown Voltage=77.8V, JLCPCB Part Class="Extended Part", LCSC Part Name="单向TVS 70V截止", Manufacturer=MDD, Manufacturer Part=SMBJ70A, Maximum Clamping Voltage=113V, Peak Pulse Current (Ipp)@10/1000μs=5.3A, Reverse Stand-Off Voltage (Vrwm)=70V, Add into BOM=yes, Convert to PCB=yes, Datasheet=https://atta.szlcsc.com/upload/public/pdf/source/20230314/C8F66EF07395B88C11214ABD10019202.pdf, Device=SMBJ70A_C114008, Name=SMBJ70A, Polarity=单?, Supplier=LCSC, Supplier Footprint=SMB(DO-214AA), Supplier Part=C114008, Symbol=SMBJ70A
D4 D6: "ESD 单向 5V", BOM_JLCPCB Part Class="Extended Part", BOM_Manufacturer=MDD, BOM_Manufacturer Part=SMF6.5A, BOM_Supplier=LCSC, BOM_Supplier Part=C123792, Contributor=LCSC, spicePre=D, spiceSymbolName=SMF6.5A
D7 D10 D12 D13 D14 D16: "二极管"
D9: "稳压二极管"
JLINK1: "连接端子", BOM_Manufacturer="Changjiang Connectors", BOM_Manufacturer Part=A1257WR-S-4P, BOM_Supplier=LCSC, BOM_Supplier Part=C225127, Contributor=LCSC, spicePre=C, spiceSymbolName=A1257WR-S-4P
L1 L3 L4 L5: library part 磁珠470Ω, BOM_Manufacturer=Sunlord, BOM_Manufacturer Part=UPZ1608U471-1R5TF, BOM_Supplier=LCSC, BOM_Supplier Part=C74335, nameAlias=Value, spicePre=L, spiceSymbolName=UPZ1608U471-1R5TF
L2: library part L-SMDP, "贴片功率电感"
Q2 Q3 Q4 Q5 Q6 Q7 Q8 Q9 Q10 Q11 Q12 Q13 Q14 Q15 Q16 Q17: library part YJL3400A, BOM_JLCPCB Part Class="Extended Part", BOM_Manufacturer="Yangzhou Yangjie Elec Tech", BOM_Manufacturer Part=YJL3400A, BOM_Supplier=LCSC, BOM_Supplier Part=C699302, Contributor=LCSC, spicePre=Q, spiceSymbolName=YJL3400A
R1 R2 R3 R4 R5 R6 R7 R8 R9 R10 R11 R12 R13 R14 R15 R16 R17 R18 R19 R20 R21 R22 R23 R24 R25 R26 R27 R29 R30 R31 R32 R33 R34 R35 R35B R36 R37 R38 R40 R41 R42 R43 R44 R45 R47 R48 R49 R51 R52 R53 R54 R55 R56 R57 R58 R59 R61 R62 R63 R64 R65 R66 R67 R68 R71 R72 R73 R74 R75 R76 R77 R78 VDD: library part RES, "贴片电阻"
R69 R70: BOM_LCSC Assembly=Yes, BOM_Manufacturer=UniOhm, BOM_Manufacturer Part=0805W8F0000T5E, BOM_Supplier=LCSC, BOM_Supplier Part=C17477, nameAlias="Resistance (Ohms)", SMT Type=Basic, spicePre=R, spiceSymbolName=0805W8F0000T5E
R_BEEP: library part RES
RST1 SW1 SW2: Contact Current=50mA, Insulation Resistance=100MΩ, JLCPCB Part Class="Extended Part", LCSC Part Name="轻触开关 3.", Manufacturer=º«¹, Manufacturer Part=K2-1107ST-A4DW-06, Operating Force=250gf@±30gf, Operating Temperature=-25℃~+85?, Voltage Rating (DC)=12V, Actuator Style=¾ØÐ, Add into BOM=yes, Circuit=µ¥µ, Convert to PCB=yes, Datasheet=https://atta.szlcsc.com/upload/public/pdf/source/20210810/381712CEF248770C072B585C3485C888.pdf, Device=K2-1107ST-A4DW-06_C118141, Mechanical Life=100000, Mounting Style=立?, Name=K2-1107ST-A4DW-06, Supplier=LCSC, Supplier Footprint=SMD, Supplier Part=C118141, Switch Height=2.5mm, Switch Length=6.1mm, Switch Width=3.6mm, Symbol=K2-1107ST-A4SW-06, With Lamp=-
SW3: BOM_Manufacturer=HRO, BOM_Manufacturer Part=DS-02BP, BOM_Supplier=LCSC, BOM_Supplier Part=C129068, Contributor=LCSC, spicePre=S, spiceSymbolName=DS-02BP
U1: Dropout Voltage=-, JLCPCB Part Class="Extended Part", LCSC Part Name="正 Vin=60V Vout=12V 50mA 50dB@(100Hz)", Manufacturer=DIODES(美?, Maximum Input Voltage=60V, Output Current=50mA, Output Voltage=12V, Power Supply Rejection Ratio (PSRR)=50dB@(100Hz), Add into BOM=yes, Convert to PCB=yes, Datasheet=https://atta.szlcsc.com/upload/public/pdf/source/20191028/C441831_30B6D71C82CD52B81E1403E5F67B24E2.pdf, Device=ZXTR2112F-7, Manufacturer Part=ZXTR2112F-7, Name=ZXTR2112F-7, Number of Outputs=1, Output Polarity=正, Output Type=固?, Supplier=LCSC, Supplier Footprint=SOT-23, Supplier Part=C441831, Symbol=ZXTR2112F-7
U2: JLCPCB Part Class="Extended Part", Manufacturer=TI(µÂÖ, Operating Temperature="0°C ~ 70?", Supply Voltage（Single）="3V ~ 32V, ±1.5V", Add into BOM=yes, Amplifier Type="General Purpose", Convert to PCB=yes, Datasheet=https://atta.szlcsc.com/upload/public/pdf/source/20140704/1457707114488.pdf, Device=LM324DR, Gain Bandwidth Product（GBP）=1.2, Iq per channel (Typ)=1.4mA, LCSC Part Name=LM324DR, Manufacturer Part=LM324DR, Name=LM324DR, Number of Circuits=4, Output Type=-, Slew Rate（SR）="0.5 V", Supplier=LCSC, Supplier Footprint=SOIC-14, Supplier Part=C7943, Symbol=LM324DR
U3: JLCPCB Part Class="Extended Part", LCSC Part Name="低边 IGBT MOSFET 灌:", Manufacturer=Slkor(Èø¿, Operating Temperature=-40℃~+125℃@(, Peak Output Current(sink)=8A, Peak Output Current(source)=4A, Supply Voltage=4.5V~20V, Add into BOM=yes, Convert to PCB=yes, Datasheet=https://atta.szlcsc.com/upload/public/pdf/source/20210108/C2681373_CD41C44CDBB9248B0528B6216F344054.pdf, Device=SL27511, Driven Configuration=低?, Fall Time=4.5ns, Feature=Ç·Ñ¹±, loadtype=MOSFET；IGBT, Manufacturer Part=SL27511, Name=SL27511, Number of Drivers=1, Propagation Delay tpHL=16ns, Propagation Delay tpLH=16ns, Rise Time=6ns, Supplier=LCSC, Supplier Footprint=SOT-23-6, Supplier Part=C2681373, Symbol=SL27511, Whether the isolation=非?
U4: "1.225V", Input Voltage=-, JLCPCB Part Class="Extended Part", LCSC Part Name="并联 1.225V 1", Manufacturer=TI(µÂÖ, Minimum Cathode Current for Regulation=80uA, Operating Temperature=-40℃~+85℃@(, Output Current=12mA, Temperature Coefficient=100ppm/℃, Tolerance=±0.5%, Add into BOM=yes, Convert to PCB=yes, Datasheet=https://atta.szlcsc.com/upload/public/pdf/source/20170930/C133587_1506736441908997434.pdf, Device=LM4041C12IDBZR, Manufacturer Part=LM4041C12IDBZR, Name=LM4041C12IDBZR, Noise - 1/10Hz to 10Hz=-, Noise - 10Hz to 10kHz=20uVrms, Output Type=固?, Output Voltage=1.225V, Reference Type=并?, Supplier=LCSC, Supplier Footprint=SOT-23, Supplier Part=C133587, Supply Current=-, Symbol=LM4041C12IDBZR
U5: JLCPCB Part Class="Basic Part", LCSC Part Name="ARM Cortex-M3 72MHz MSL=3", Low-Voltage Detect=-, Manufacturer=ST(意法, Operating Temperature Range=-40℃~+85?, Operating Voltage Range=2V~3.6V, ADC (Bit)=12bit, Add into BOM=yes, CCP Capture/Compare=-, communication protocol=-, Convert to PCB=yes, CPU Core="ARM Cortex-M3", CPU Maximum Speed=72MHz, DAC (Bit)=-, Datasheet=https://atta.szlcsc.com/upload/public/pdf/source/20220812/8363ACEC51AD55ECEB84799464F7CB85.pdf, Device=STM32F103C8T6, Direct Memory Access=-, EEPROM=64KB, GPIO Ports Number=37, Infrared Data Association=-, Internal Comparator=-, Internal Oscillator=有, Manufacturer Part=STM32F103C8T6, Name=STM32F103C8T6, Peripheral/Function=看门狗；D, Program Memory Type=FLASH, Program Storage Size=64KB, PWM (Bit)=-, RAM Size=20KB, Real-Time Clock=-, Secure Digital Input and Output=-, Supplier=LCSC, Supplier Footprint=LQFP-48(7x7), Supplier Part=C8734, Symbol=STM32F103C8T6, Universal Serial Bus=-, Watchdog=-
U6: "CANоƬ", BOM_JLCPCB Part Class="Extended Part", BOM_Manufacturer=NXP, BOM_Manufacturer Part=TJA1051T/3/1J, BOM_Supplier=LCSC, BOM_Supplier Part=C38695, spicePre=U, spiceSymbolName=TJA1051T/3/1J
U7: "DCDC ADJ 3A", Input Voltage=-, JLCPCB Part Class="Extended Part", LCSC Part Name=降?, Manufacturer=矽力杰s, Add into BOM=yes, Convert to PCB=yes, Datasheet=https://atta.szlcsc.com/upload/public/pdf/source/20170308/1488958431714.pdf, Device=SY8303AIC, Function=降?, Manufacturer Part=SY8303AIC, Name=SY8303AIC, Number of Outputs=-, Output Current (Max)=-, Supplier=LCSC, Supplier Footprint=TSOT-23-8, Supplier Part=C97054, Switching Frequency=-, Symbol=SY8303AIC, Synchronous Rectification=-, Topology=-
U8: BOM_JLCPCB SMD=Yes, BOM_Manufacturer=TI, BOM_Manufacturer Part=LP5907QMFX-3.3Q1, BOM_Supplier=LCSC, BOM_Supplier Part=C130005, Contributor=LCSC, SMT Type=Extend, spicePre=U, spiceSymbolName=LP5907QMFX-3.3Q1
U9: "内建可编程增益放大器的多通道24-bit的Delta Sigma A/D转换器", JLCPCB Part Class="Extended Part", LCSC Part Name="TM7705  խ?", Manufacturer=TM(天?, Manufacturer Part=TM7705, Add into BOM=yes, Convert to PCB=yes, Datasheet=https://atta.szlcsc.com/upload/public/pdf/source/20160706/1467801115498.pdf, Device=TM7705_C77545, Name=TM7705, Supplier=LCSC, Supplier Footprint=SOIC-16, Supplier Part=C77545, Symbol=TM7705_C77545
USART1: library part "GH1.25 4p", "连接端子", BOM_Manufacturer="Changjiang Connectors", BOM_Manufacturer Part=A1257WR-S-4P, BOM_Supplier=LCSC, BOM_Supplier Part=C225127, Contributor=LCSC, spicePre=C, spiceSymbolName=A1257WR-S-4P
X1: "有源晶振12M", BOM_Manufacturer="Yangxing Tech", BOM_Manufacturer Part=OP322512MEDA4SI-u, BOM_Supplier=LCSC, BOM_Supplier Part=C382483, Contributor=LCSC, nameAlias=Frequency, spicePre=X, spiceSymbolName=OP322512MEDA4SI-U
X2: Frequency Stability=±10ppm, JLCPCB Part Class="Extended Part", LCSC Part Name="8MHz ±10ppm 1.8V~3.3V", Manufacturer=YXC(ÑïÐ, Operating Temperature=-40℃~+85?, Supply Voltage=1.8V~3.3V, Add into BOM=yes, Convert to PCB=yes, Datasheet=https://atta.szlcsc.com/upload/public/pdf/source/20210329/C669065_30B18CFE780D377BA4E84F6ED1951959.pdf, Device=OT32258MJBA4SL, Manufacturer Part=OT32258MJBA4SL, Name=8MHz, Supplier=LCSC, Supplier Footprint=SMD3225-4P, Supplier Part=C717687, Symbol=OT32258MJBA4SL

## Via types
v1: diameter 24, hole 12, Top Layer to Bottom Layer, tented both sides, 277 vias
v2: diameter 34, hole 22, Top Layer to Bottom Layer, tented both sides, 32 vias
v3: diameter 50/50/50 (per signal layer), hole 28, Top Layer to Bottom Layer, tented both sides, 11 vias

## Nets (pads, with @x,y where several pads share a name; then routed paths per layer and width w, separated by ;. In a path a pad name is that pad's centre, name@x,y a point inside that pad or via, vN(x,y) a via of type N, cw(c..) or ccw(c..) an arc to the next point about the centre after c; other vN are vias at no path point)
3V3: 3V3.1 *1.3 *2.3 *3.3 C10.1 C12.2 C24.2 C26.2 C27.2 C47.2 C48.2 C49.2 L1.2 L3.2 L4.1 R22.1 R61.1 R62.1 R71.2 U5.24 U5.36 U5.48 | length 7178.2
  Top Layer w8: v1(1859.41,789.41) 1859.41,759.41 1815,715 1815,451.93 3V3.1@1865,401.93
  Top Layer w10: R71.2@2447.5,1578.77 2449,1578.77 2475,1604.77 v1(2475,1605) ; v1(2615,1495) 2638.1,1495 ; C10.1@2638.1,1401.9 2638.1,1495 ; C24.2@2645,1885 2660,1870 2660,1868.79 2711.9,1816.88 ; U5.48@2669.42,1516.96 2645.37,1516.96 2638.1,1509.69 2638.1,1495 ; v1(2696.88,1816.88) 2711.9,1816.88 ; U5.36@2728.47,1792.55 2728.47,1816.59 2728.17,1816.88 2711.9,1816.88 ; L1.2@2863.17,923.75 C12.2@2930,923.75 ; v1(2930,890) C12.2@2930,923.75 ; C12.2@2930,924.41 C12.2@2930,923.75 ; U5.24@3004.06,1733.5 v1@3004.06,1795.24 ; v1(3004.06,1804.06) v1@3004.06,1795.24 ; R22.1@3030.6,1310.6 3039.4,1310.6 3039.95,1311.16 3048.84,1311.16 v1(3065,1295) ; C27.2@3056.91,1848.1 v1@3004.06,1795.24
  Top Layer w20: v1(1695,1175) 1750,1175 L4.1@1795,1220
  POWER w10: v1(2475,1605) 2585,1495 v1(2615,1495) ; v1(2930,890) 2930,1061.82 3065,1196.82 v1(3065,1295)
  POWER w15: v1(1695,1175) 1535,1335 1535,1515 1595,1575 1725,1575 1775,1625 1865,1625 v1(1885,1645) 1910,1670 1910,1910 v1(2003.09,2003.09)
  POWER w20: v1(1855,1315) 1854.23,1314.23 1834.23,1314.23 v1(1695,1175) 1775,1095 1775,984.95 1859.41,900.54 ; v1(1859.41,789.41) 1859.41,900.54 ; 2585,1495 2535,1445 2445,1445 2095,1095 2095,1005 2025,935 1893.87,935 1859.41,900.54
  Bottom Layer w10: *1.3@1745,1709.41 1790.71,1709.41 C47.2@1810.71,1689.41 1840.59,1689.41 v1(1885,1645) ; *2.3@1749.29,1379.41 ccw(c1769.29,1379.41) 1769.29,1359.41 C48.2@1815,1359.41
  Bottom Layer w15: C49.2@1935,1980.59 1972.5,1980.59 ; *3.3@2000.71,1960.59 1990.87,1960.59 1990.49,1960.96 1990.49,1962.59 1972.5,1980.59 ; v1(2003.09,2003.09) 1995,2003.09 1972.5,1980.59
  Bottom Layer w20: C48.2@1815,1359.41 1815,1355 v1(1855,1315) ; v1(1859.41,789.41) C26.2@2145,789.41 2147.21,787.21 2217.79,787.21 L3.2@2220,785 ; v1(3065,1295) 3035,1265 2676.72,1265 2635,1306.72 2635,1475 v1(2615,1495) 2615,1496.08 2592.5,1518.58 2592.5,1526.39 2565,1553.89 2565,1765 2616.88,1816.88 v1(2696.88,1816.88) 2728.77,1785 2856.34,1785 2875.4,1804.06 v1(3004.06,1804.06) 3005.14,1804.06 3036.08,1835 R61.1@3130.5,1835 R62.1@3130.5,1755
12V: 12V.1 C2.2 C4.2 C5.2 R1.1 U1.2 U2.4 U3.1 | length 2426.4
  Top Layer w8: 12V.1@1665,401.92 v1(1665,445)
  Top Layer w10: U3.1@1924.04,679.42 1933.88,679.42 1949.41,694.95 C5.2@1949.41,755 C4.2@1949.41,815 ; U1.2@2854.36,342.4 U1.2@2863.62,342.4 2923.19,342.4 C2.2@2935,330.59 2996.09,330.59 R1.1@3005,339.5
  Top Layer w20: v1(2515,805) 2515,625 2535,605 2735,605 2775,565 2775,421.77 U1.2@2854.36,342.4
  Top Layer w40: C4.2@1949.41,815 1953.09,818.68 1953.09,853.09 v3(1955,855)
  POWER w8: v1(1665,445) 1895,445 2105,655 2105,715
  POWER w40: v3@1949.41,849.41 v3(1955,855) 2095,715 ; 2105,715 2425,715 v1(2515,805)
  Bottom Layer w10: U2.4@2515,735.56 v1(2515,805)
24V_IN: *.3 BUZZER1.1 C20.1 C21.1 C22.1 C23.1 C45.1 CN1.2 CN2.2 CN3.2 CN4.2 D13.2 R19.2 U7.5 | length 4140
  Top Layer w15: *.3@1015,355 1024.5,364.5 R19.2@1024.5,505
  Top Layer w40: CN4.2@385,2153.74 388.83,2157.57 388.83,2208.83 465,2285 645,2285 679.9,2250.1 679.9,2207.5 C45.1@682.4,2205 766.65,2205 BUZZER1.1@826.65,2265 ; BUZZER1.1@835,2265 1032.86,2462.86 D13.2@1219.19,2462.86
  Top Layer w50: C23.1@890,362.09 910,362.09 917.09,355 *.3@1015,355 C21.1@1115,355
  POWER w80: 295,1335 295,1332.68 CN1.2@385,1332.68 ; 295,1615 295,1606.36 CN2.2@385,1606.36 ; 295,1875 295,1880.05 CN3.2@385,1880.05 ; 315,2153.74 CN4.2@385,2153.74
  POWER w90: 295,1332.68 295,955 495,755 495,455 595,355 *.3@1015,355 ; 295,1335 295,1606.36 ; 295,1615 295,1875 ; 295,1880.05 295,2153.74
24V_SW: U2.1 U3.6 | length 402.9
  Top Layer w10: U3.6@2037.15,672.61 U3.6@2030.34,679.42 2070.58,679.42 v1(2071.69,678.32)
  Bottom Layer w10: v1(2071.69,678.32) 2118.37,725 2343.26,725 2363.26,705 2365,705 U2.1@2365,735.56
24V_SW_OUT: 24.1 *.10 R6.1 R7.1 | length 879.8
  Top Layer w8: 24.1@1565,401.93 1748.07,585 R7.1@1780.5,585
  Top Layer w10: *.10@1510,995 *.10@1517.61,987.39
  Top Layer w20: *.10@1510,995 1605,995 1780.5,819.5 R7.1@1780.5,585
48V: 48V.1 *.1 C3.1 D2.1 R48.2 U1.3 | length 2302.5
  Top Layer w10: 48V.1@1465,401.93 v1(1465,435)
  Top Layer w20: *.1@2515,355 2657.91,355 C3.1@2665,362.09 ; D2.1@2682.06,495 2682.06,379.15 C3.1@2665,362.09 ; U1.3@2766.37,305 2764.56,306.81 2740.28,306.81 2685,362.09 C3.1@2665,362.09
  POWER w10: v1(1465,435) 1475,435 1555,355 *.1@2515,355
  Bottom Layer w10: *.1@2515,355 3015,355 3085,425 3085,508 3025,568 R48.2@3025,569.5
A+: *.6 R13.2 | length 190.2
  Bottom Layer w10: *.6@1305,1525 1393.58,1525 ccw(c1393.58,1625) 1464.29,1554.29 R13.2@1480.6,1570.6
A-: *.5 R12.2 | length 245.4
  Bottom Layer w10: *.5@1205,1525 1281.32,1601.32 cw(c1352.03,1530.61) 1337.5,1629.54 1409.54,1629.54 R12.2@1410.61,1630.61
AGND: *1.2 *2.2 *3.2 C6.2 C7.2 C8.2 C31.2 C32.2 C33.2 C40.1 C47.1 C48.1 C49.1 R34.1 R35B.2 U4.2 U9.16 | length 2889.4
  Top Layer w20: v1(1855,1395) 1955,1295 v1(1955,1225) ; v1(1859.41,1779.41) 1866.32,1772.5 1896.39,1772.5 1913.89,1755 v1(1965,1755)
  POWER w20: v1(1595,1505) 1635,1505 1745,1395 v1(1855,1395) 1965,1505 v1(1965,1755) ; v1(1845,1045) 1875,1075 1935,1075 1955,1095 v1(1955,1225)
  Bottom Layer w10: U4.2@1727.6,1216.38 1727.6,1332.4 1705,1355 1705,1385 1722.13,1402.13 1746.42,1402.13 *2.2@1749.29,1405 cw(c1754.89,1405) 1754.89,1410.59 C48.1@1815,1410.59 1825,1400.59 1849.41,1400.59 v1(1855,1395) ; *1.2@1745,1735 1805.12,1735 C47.1@1810.71,1740.59 ; C49.1@1935,1929.41 1940.59,1935 *3.2@2000.71,1935 ; v1(1955,1225) C40.1@1989.41,1225 1965,1249.41 U9.16@1965,1305
  Bottom Layer w20: v1(1595,1505) 1595.77,1505.77 1595.77,1535.77 1625,1565 C7.2@1689.41,1565 ; C6.2@1790.59,1905 1795.59,1900 1880,1900 1889.41,1890.59 1889.41,1883.82 ; C47.1@1805.12,1735 1815,1735 v1(1859.41,1779.41) ; C49.1@1935,1929.41 1889.41,1883.82 ; v1(1965,1755) 1965,1758.67 1910.09,1813.58 1910.09,1814.32 C8.2@1889.41,1835 1889.41,1883.82 ; R35B.2@1982.75,1080.5 1979.75,1077.5 1878.58,1077.5 1846.08,1045 v1(1845,1045) 1835,1035 1835,936.13 1846.72,924.41 1870,924.41 C31.2@1875,919.41 C33.2@2000.87,919.41
AVDD: C31.1 C32.1 C33.1 C40.2 L5.2 U9.13 U9.14 | length 975
  POWER w20: v3@1937,1025 2090,1178 v1(2090,1365)
  Bottom Layer w10: C40.2@2040.59,1225 2065,1249.42 U9.14@2065,1305 2065,1355 2075,1365 v1(2090,1365) 2105,1365 2115,1355 U9.13@2115,1305
  Bottom Layer w20: C31.1@1875,970.59 1935,970.59 v3@1935,1024.06 ; 1907.94,970.3 C32.1@1937.94,970.3 ; 1969.69,970.59 C32.1@1939.69,970.59 1937.94,970.59 C32.1@1937.94,970.3 ; C33.1@2000.57,970.3 C32.1@1937.94,970.3 ; C33.1@2000.87,970.59 2005.87,965.59 2019.41,965.59 L5.2@2065,920
  other v3: 1935,1025
B+: *.8 R73.2 | length 427.6
  Bottom Layer w10: *.8@1310,995 1310,1235 cw(c1410,1235) 1410,1335 R73.2@1440.5,1335
B-: *.7 R14.2 | length 637.6
  Bottom Layer w10: *.7@1210,995 1210,1345 cw(c1310,1345) 1310,1445 R14.2@1440.5,1445
B_A: CN2.4 Q6.3 | length 316.4
  Top Layer w40: CN2.4@388.83,1524.51 388.83,1474.51 454.62,1408.71 628,1408.71
B_B: CN1.4 Q7.3 | length 316.4
  Top Layer w40: CN1.4@388.83,1251.17 388.83,1201.17 454.62,1135.38 628,1135.38
B_C: CN3.4 Q12.3 | length 316.4
  Top Layer w40: CN3.4@388.83,1797.84 388.83,1747.84 454.62,1682.04 628,1682.04
B_D: CN4.4 Q13.3 | length 322.8
  Top Layer w40: CN4.4@385,2075 388.83,2071.17 388.83,2021.17 454.62,1955.38 Q13.3@629,1955.38
BEEP: R50.18 R_BEEP.1 | length 1200.4
  Top Layer w10: R_BEEP.1@1175,2010.59 1175,2135 1246.81,2206.81 v1@1795,2206.81 ; v1(2005,2135) 2095,2045 R50.18@2155,2045
  POWER w10: v1(1795,2205) 1935,2205 v1(2005,2135)
BLUE: Q14.1 R50.16 | length 1811.8
  Top Layer w10: Q14.1@1322.4,650 v1(1322.4,692.4) ; v1(1645,1075) 1645,1085 1695,1135 v1(1845,1135) ; v1(2005,1715) 2005,1828.46 2121.54,1945 R50.16@2155,1945
  POWER w10: v1(1322.4,692.4) 1430.04,800.04 1540.04,800.04 1645,905 v1(1645,1075) ; v1(1845,1135) 1845,1235 2005,1395 v1(2005,1715)
BOOT0: R69.2 SW3.4 U5.44 | length 2073.7
  Top Layer w8: SW3.4@2255,265 2255,289.41 2255,369.61 2329.9,444.51 2329.9,679.9 2505,855 v1(2535,855) ; v1(2465,895) 2495.2,895 2581,980.8 2581,1171 2731,1321 2731,1388.59 2714.59,1405 2695,1405 2659,1369 2632.01,1369 2555.51,1445.51 2555.51,1505.51 2625,1575 2625,1585 2635.2,1595.2 2668.91,1595.2 U5.44@2669.42,1595.7
  Top Layer w10: SW3.4@2255,289.41 2275.59,310 2314.42,310 R69.2@2405,400.59
  POWER w8: v1(2465,895) 2505,855 v1(2535,855)
BOOT1: SW3.3 U5.20 | length 1787.9
  Top Layer w10: SW3.3@2155,265 2155,289.41 2315,449.41 2315,695 2595,975 2595,1165 2745,1315 v1(2745,1405) ; v1(2835,1565) 2924.76,1654.76 U5.20@3004.06,1654.76
  Bottom Layer w10: v1(2745,1405) 2745,1475 v1(2835,1565)
C+: *.11 R75.2 | length 137.8
  Bottom Layer w10: R75.2@2225,2039.5 2225,2041 2315,2131 *.11@2315,2140
C-: *.9 R74.2 | length 152.5
  Bottom Layer w10: R74.2@2305,2039.5 2305,2041 2317.5,2053.5 2328.5,2053.5 *.9@2415,2140
CAN1_H: CN6.1 D4.2 R23.2 U6.7 | length 617.3
  Top Layer w10: CN6.1@1530.4,2322.01 1530.4,2259.6 1565,2225 1635,2225 1770.5,2360.5 R23.2@1845,2360.5 ; D4.2@1858.46,2295 1858.46,2345.54 1845,2359 R23.2@1845,2360.5 ; U6.7@1941.13,2366.93 1851.43,2366.93 R23.2@1845,2360.5
CAN1_L: CN6.2 D6.2 R23.1 U6.6 | length 591.4
  Top Layer w10: CN6.2@1579.6,2322.01 1579.6,2260.86 1585.46,2255 1625,2255 1799.5,2429.5 R23.1@1845,2429.5 ; R23.1@1832.5,2443.5 R23.1@1845,2431 ; D6.2@1858.46,2495 1858.46,2444.46 R23.1@1845,2431 ; U6.6@1941.13,2416.93 1857.5,2416.93 1845,2429.43 R23.1@1845,2429.5 ; R23.1@1845,2429.5 R23.1@1845,2431
G_A: CN2.1 Q4.3 | length 510.3
  Top Layer w40: CN2.1@486.26,1607.07 555,1538.33 778.22,1538.33 907.84,1408.71 Q4.3@914.38,1408.71
G_B: CN1.1 Q5.3 | length 503.7
  Top Layer w40: CN1.1@486.26,1333.74 555,1265 778.22,1265 Q5.3@907.84,1135.38
G_C: CN3.1 Q10.3 | length 510.3
  Top Layer w40: CN3.1@486.26,1880.41 555,1811.67 778.22,1811.67 907.84,1682.04 Q10.3@914.38,1682.04
G_D: CN4.1 Q11.3 | length 532.8
  Top Layer w40: CN4.1@463.74,2153.74 486.26,2153.74 555,2085 778.22,2085 907.84,1955.38 Q11.3@914.38,1955.38
GND: *.2 *.4 *.13 C1.1 C2.1 C3.2 C4.1 C5.1 C10.2 C11.1 C12.1 C13.2 C16.2 C17.1 C19.2 C20.2 C21.2 C22.2 C23.2 C24.1 C25.1 C26.1 C27.1 C28.2 C29.2 C30.2 C34.2 C35.2 C36.2 C37.2 C38.2 C39.1 C41.2 C42.2 C43.2 C44.2 C45.2 C50.2 CN6.3 CN6.4 D2.2 D4.1 D6.1 D9.1 JLINK1.3 JLINK1.5 JLINK1.6 Q2.2 Q3.2 Q4.2 Q5.2 Q6.2 Q7.2 Q8.2 Q9.2 Q10.2 Q11.2 Q12.2 Q13.2 Q15.2 R2.2 R4.1 R5.1 R11.1 R15.1 R18.1 R25.2 R26.1 R33.2 R34.2 R39.1 R39.10 R39.19 R50.1 R50.10 R50.19 R55.2 R56.2 R58.1 R66.1 R67.1 R68.1 R69.1 R70.2 RST1.2 SW1.2 SW2.2 U1.1 U2.11 U3.4 U3.5 U5.8 U5.23 U5.35 U5.47 U6.2 U6.8 U7.3 U7.4 U8.2 U9.11 USART1.2 USART1.5 USART1.6 X1.2 X2.2 | length 6319.1
  Top Layer w10: R15.1@739.5,220 R25.2@739.5,295 ; v1(1275,2175) 1275,2151.29 1281.29,2145 R39.1@1296.74,2145 ; R39.10@1296.74,1695 v1(1365,1695) ; CN6.3@1453.62,2447.99 1455,2446.61 v3(1455,2355) ; R39.19@1655,2095 1692.15,2095 1704.5,2107.35 1717.35,2107.35 v3(1725,2115) 1729.59,2115 1759.59,2145 R50.1@1796.74,2145 v1(1855,2145) ; v1(1755,2295) D4.1@1791.54,2295 ; R50.10@1796.74,1695 v1(1875,1695) ; U6.8@1941.13,2316.93 1943.06,2315 v1(1985,2315) ; v1(2015,865) 2015,829.41 C4.1@2000.59,815 C5.1@2000.59,755 2000.59,740.59 1985,725 1985,665 2001.17,648.83 2023.53,648.83 U3.5@2030.34,642.02 U3.4@2030.34,604.62 ; v1(2076.93,2366.93) U6.2@2137.98,2366.93 2232.52,2366.93 C17.1@2235,2369.41 ; R50.19@2155,2095 2215,2095 v1(2225,2105) ; R4.1@2375,596 2375,594.5 2513.5,456 v1(2515,456) ; v1(2405,295) R69.1@2405,349.41 ; C10.2@2601.91,1438.1 2575,1465 2575,1493.18 2618.47,1536.65 U5.47@2669.42,1536.65 2736.65,1536.65 v1(2765,1565) 2825.57,1504.43 2855.57,1504.43 2866.14,1493.86 2866.14,1458.03 U5.8@2866.27,1457.91 2866.39,1457.79 2866.39,1413.61 2885,1395 2938.81,1395 C19.2@2976.9,1356.91 ; C24.1@2645,1936.18 2675,1906.18 2675,1875 2715,1835 2732.59,1835 2748.16,1819.44 U5.35@2748.16,1792.55 2748.16,1765.65 2815,1698.81 v1(2815,1645) ; v1(2747.5,1035) 2725,1035 cw(c2725,1080) 2680,1080 v1(2680,1137.23) 2680,1149.82 ; v1(2770,1220) 2765,1215 v1(2725,1215) 2705,1215 ccw(c2705,1190) 2680,1190 2680,1149.82 ; v1(2825,740) 2850.4,740 2875.4,715 ccw(c2975.4,715) 2975.4,615 C44.2@3009.41,615 ; v1(2835,1220) v1(2885,1220) cw(c2885,1180) 2925,1180 v1(2925,1155) 2925,1130 ; X1.2@2861.93,1170.09 2861.93,1131.93 cw(c2860,1131.93) 2860,1130 ; v1(2885,1040) ccw(c2885,1080) 2923.81,1070.3 ; C12.1@2930,975.59 2930,1064.11 ccw(c2923.81,1064.11) 2923.81,1070.3 ; U5.23@3004.06,1713.81 3053.81,1713.81 3093.1,1753.1 C27.1@3093.1,1811.9 3071.9,1811.9 v1(3035,1775) ; SW2.2@3078.37,930.56 v1(3154.44,930.56) ; USART1.2@3142.01,2079.59 v1(3245,2079.59) ; 2680,1149.82 cw(c2684.52,1149.82) 2684.52,1154.34 C11.1@2718.17,1154.34 ccw(c2742.51,1154.34) 2742.51,1130 2860,1130 ; 2860,1130 2925,1130 ; 2923.81,1070.3 ccw(c2885,1080) 2925,1080 v1(2925,1105) 2925,1130
  Top Layer w20: R66.1@1319.5,755 1325,760.5 1326.5,760.5 1361,795 1459.5,795 ; R67.1@1459.5,755 1459.5,795 ; v3(1459.5,870.5) 1459.5,795 ; R68.1@1599.5,755 1598,755 1558,795 1459.5,795 ; R34.2@1979.4,1399.4 2015,1435 v1(2095,1435)
  POWER w10: v1@2830,1225 ccw(c2835,1225) v1(2835,1220)
  Bottom Layer w10: R26.1@1415,399.5 R11.1@1514.75,399.5 R5.1@1614.5,399.5 ; R5.1@1615,400 R5.1@1614.5,399.5 ; v3(1965,305) 1870.5,399.5 R33.2@1815,399.5 R55.2@1715.25,399.5 R5.1@1614.5,399.5 ; v1(2195,895) cw(c2195,955) 2135,955 v1(2135,985) ; U9.11@2215,1305 2215,1230.59 C41.2@2220.59,1225 ; X2.2@2220.55,1028.31 2237.2,1011.66 2237.2,985 ; v1(2235,1085) 2185,1085 ccw(c2185,1035) 2135,1035 v1(2135,985) ; v1(2325,895) 2355,895 ccw(c2355,945) 2405,945 v1(2405,995) 2405,1045 ccw(c2365,1045) v1(2365,1085) v1(2325,1085) ; C25.1@2365,1010.59 2339.41,985 2237.2,985 ; v1(2515,456) U2.11@2515,517.52 ; v1(2135,985) 2237.2,985
  other v1: 780,270 800,285 675,440 700,440 285,490 310,490 285,515 310,515 285,540 310,540 2795,610 2875,790 3260,825 2385,905 2145,925 3310,925 2405,935 2705,1040 2135,1045 2405,1055 652.23,1075 677.23,1075 790,1075 815,1075 927.77,1075 952.77,1075 2680,1077.32 2175,1085 677.23,1100 815,1100 952.77,1100 2205,1155 1640,1175 2685,1195 2920,1200 1260,1215 1285,1215 1355,1215 1380,1215 1260,1245 1285,1245 1355,1245 1380,1245 1615,1325 1635,1340 652.23,1348.33 677.23,1348.33 790,1348.33 815,1348.33 927.77,1348.33 952.77,1348.33 677.23,1373.33 815,1373.33 952.77,1373.33 1925,1610 2320,1615 2355,1615 652.23,1621.67 677.23,1621.67 790,1621.67 815,1621.67 927.77,1621.67 952.77,1621.67 677.23,1646.67 815,1646.67 952.77,1646.67 2135,1665 1085,1825 1115,1825 1135,1850 1135,1880 652.23,1895 677.23,1895 790,1895 815,1895 927.77,1895 952.77,1895 677.23,1920 815,1920 952.77,1920 534,2191 564,2191 534,2221 564,2221
GREEN: Q17.1 R50.12 | length 1441.1
  Top Layer w10: Q17.1@1602.4,650 v1(1602.4,692.4) ; v1(1705,1015) 1775,1085 1895,1085 1905,1095 v1(1905,1105) ; v1(2065,1715) 2065,1735 2075,1745 R50.12@2155,1745
  POWER w10: v1(1602.4,692.4) 1602.4,792.4 1705,895 v1(1705,1015) ; v1(1905,1105) 1917.5,1117.5 1917.5,1247.5 2065,1395 v1(2065,1715)